# Altium PCB main_pcb.PcbDoc (part 1 of 2)
Units mil, origin at the board's own origin, x right, y up, seen from the top; angles counter-clockwise.
Board outline 4412.04 x 5197.88 mil, 4 copper layers (Top Layer, Mid-Layer Top, Mid-Layer Bottom, Bottom Layer); 125 components, 93 nets, 440 pads, 146 vias.
Unrouted connection lines stored in the file: 4.
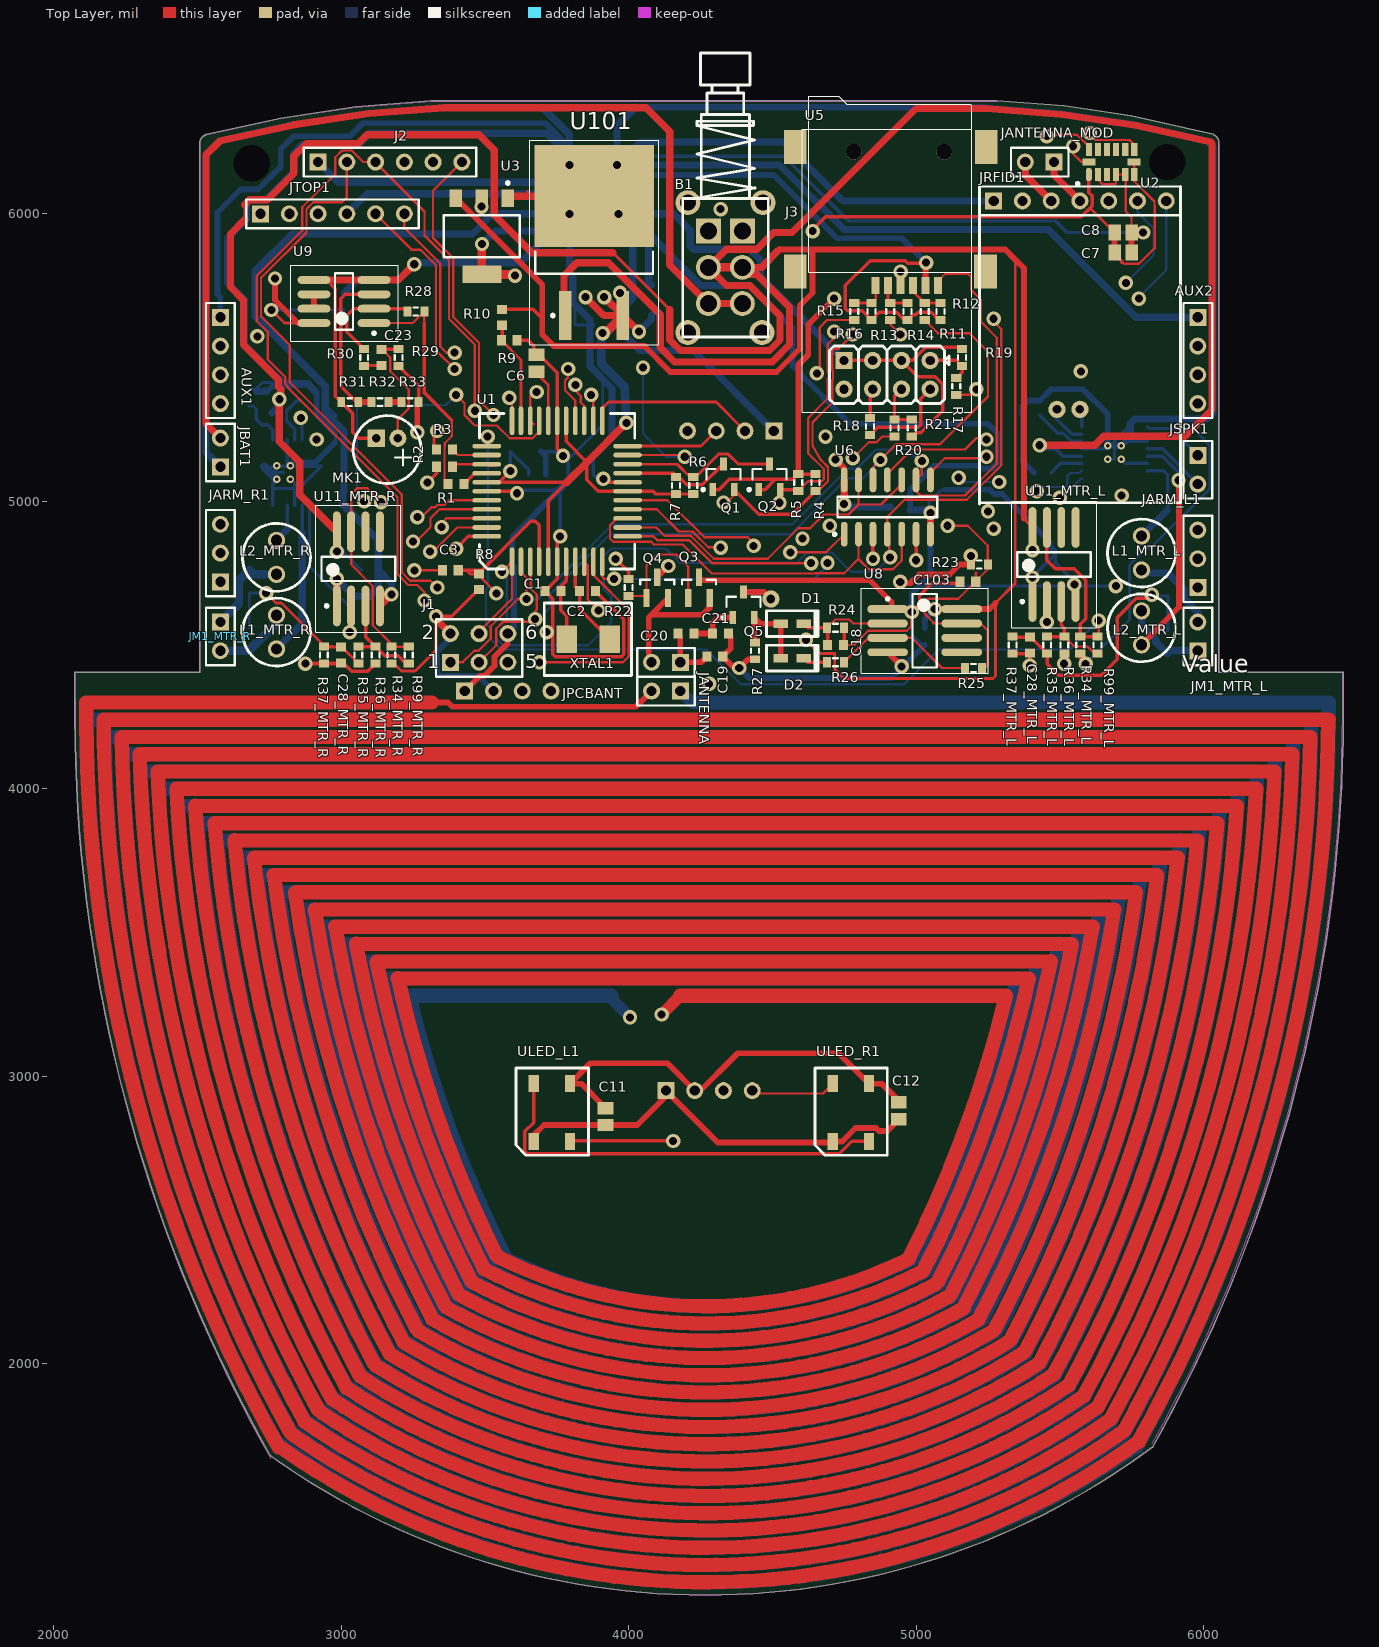
[diagram p0: Top Layer view]
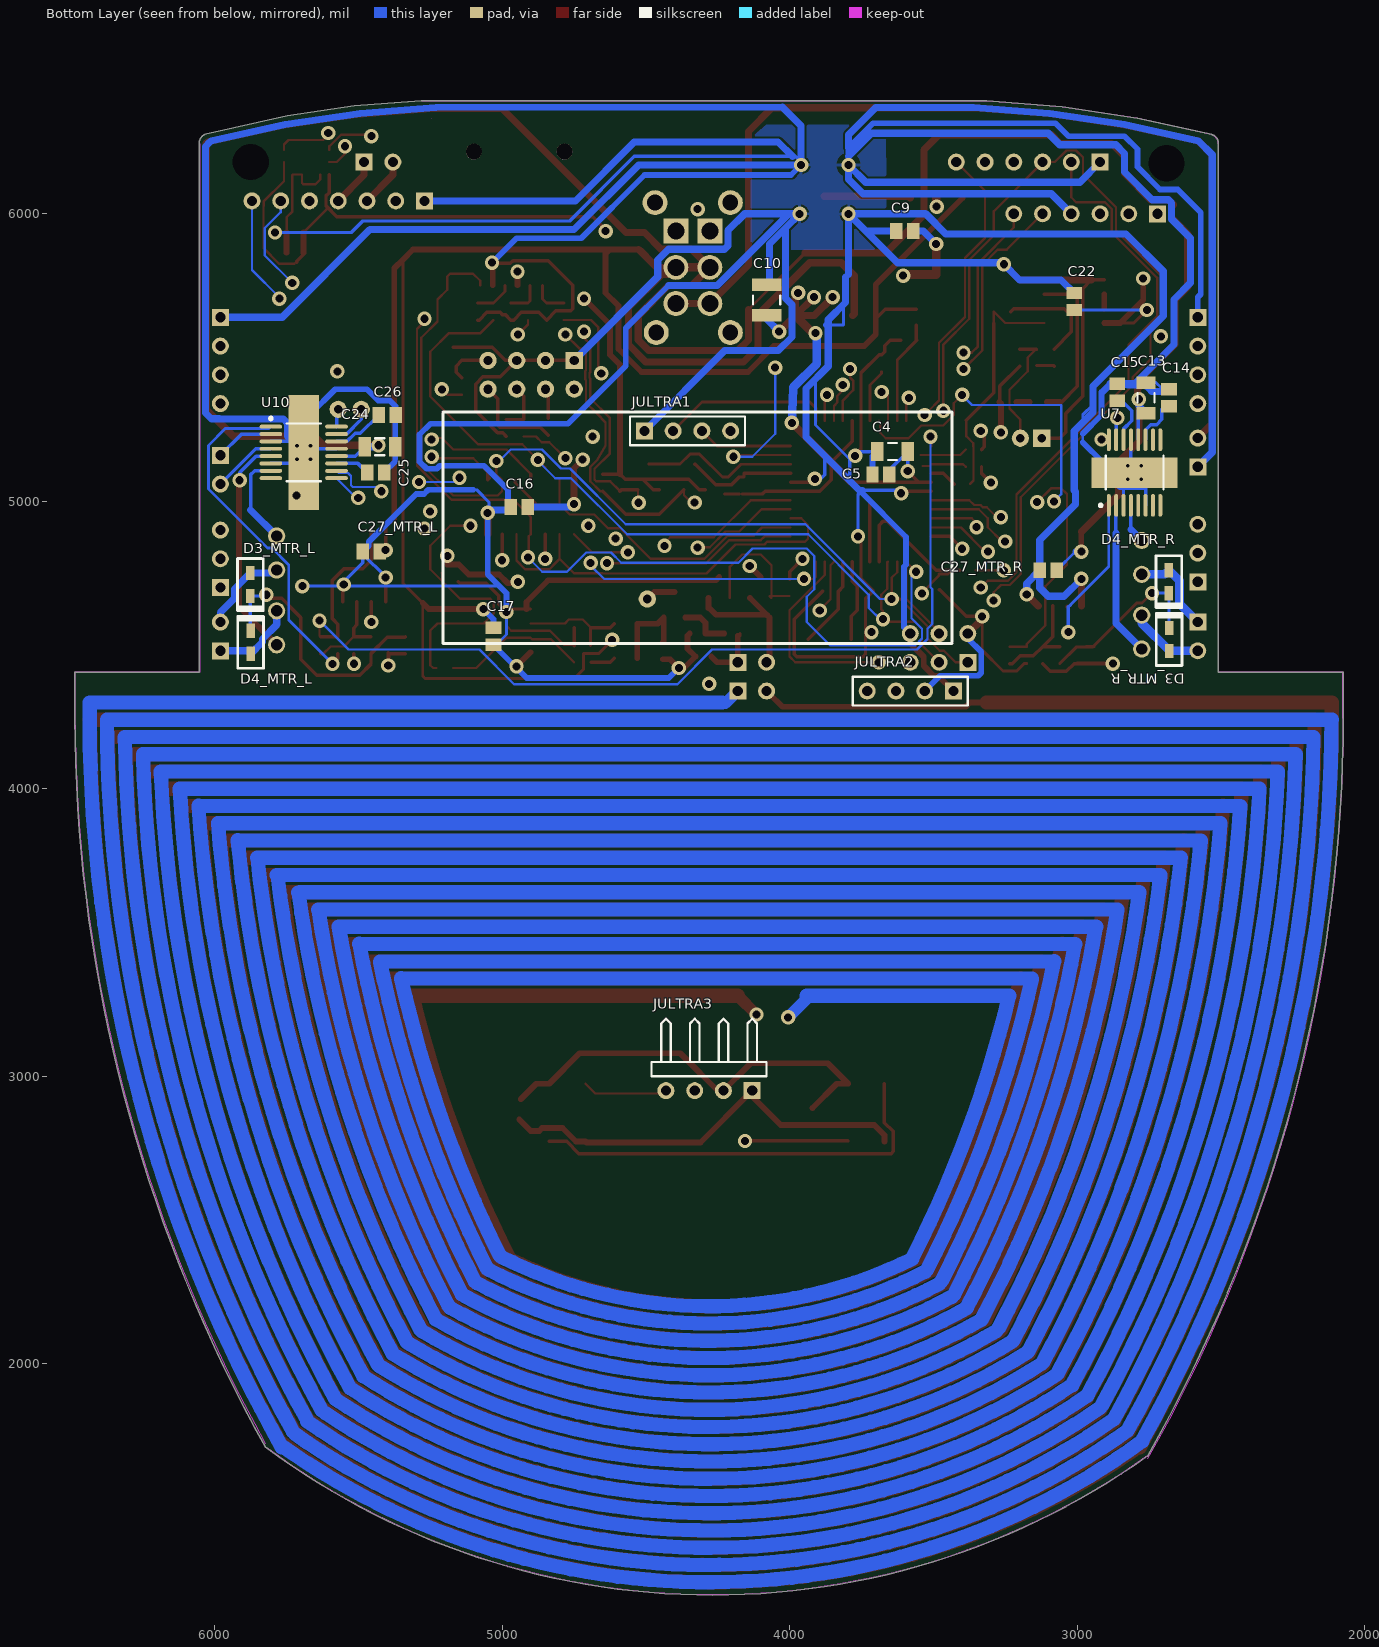
[diagram p1: Bottom Layer view, seen from below]
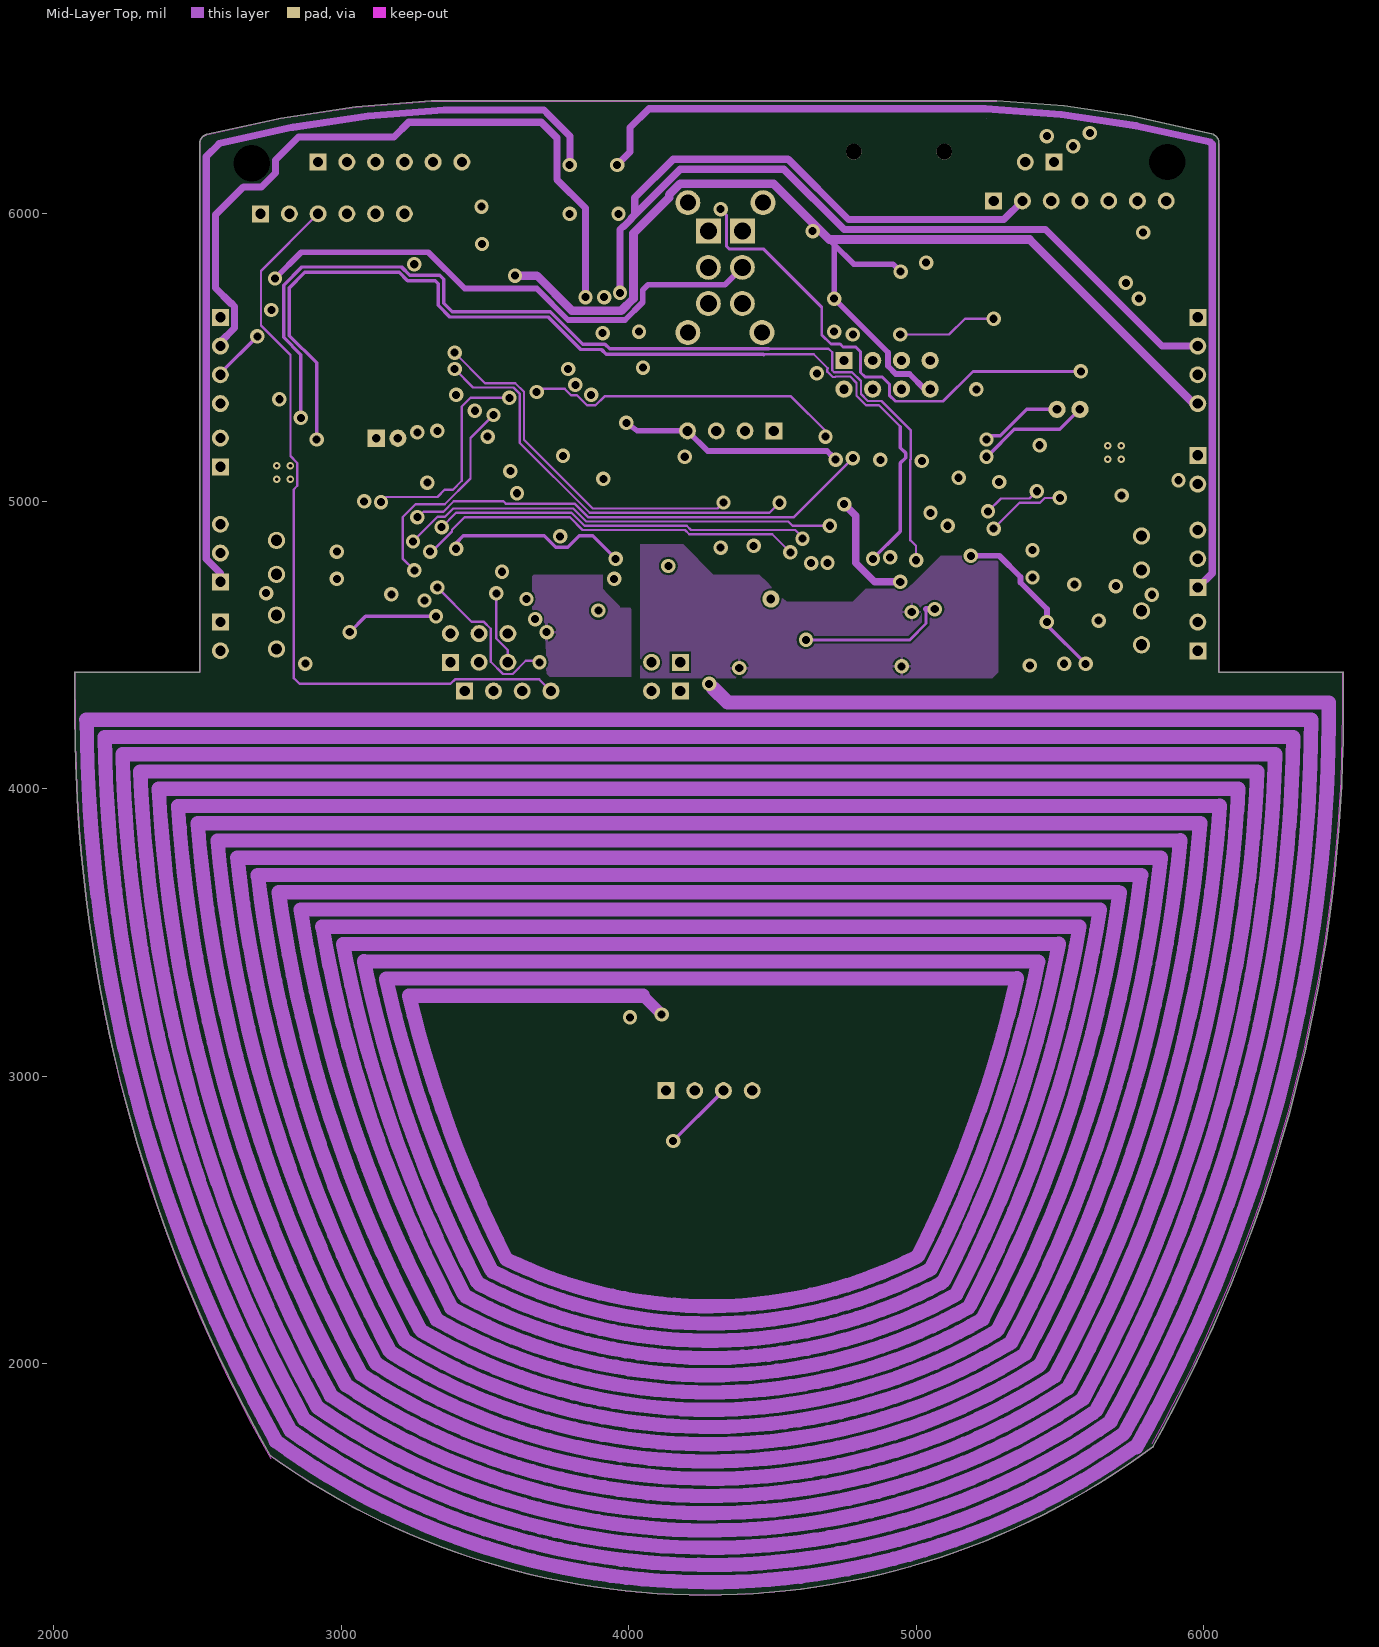
[diagram p2: Mid-Layer Top]
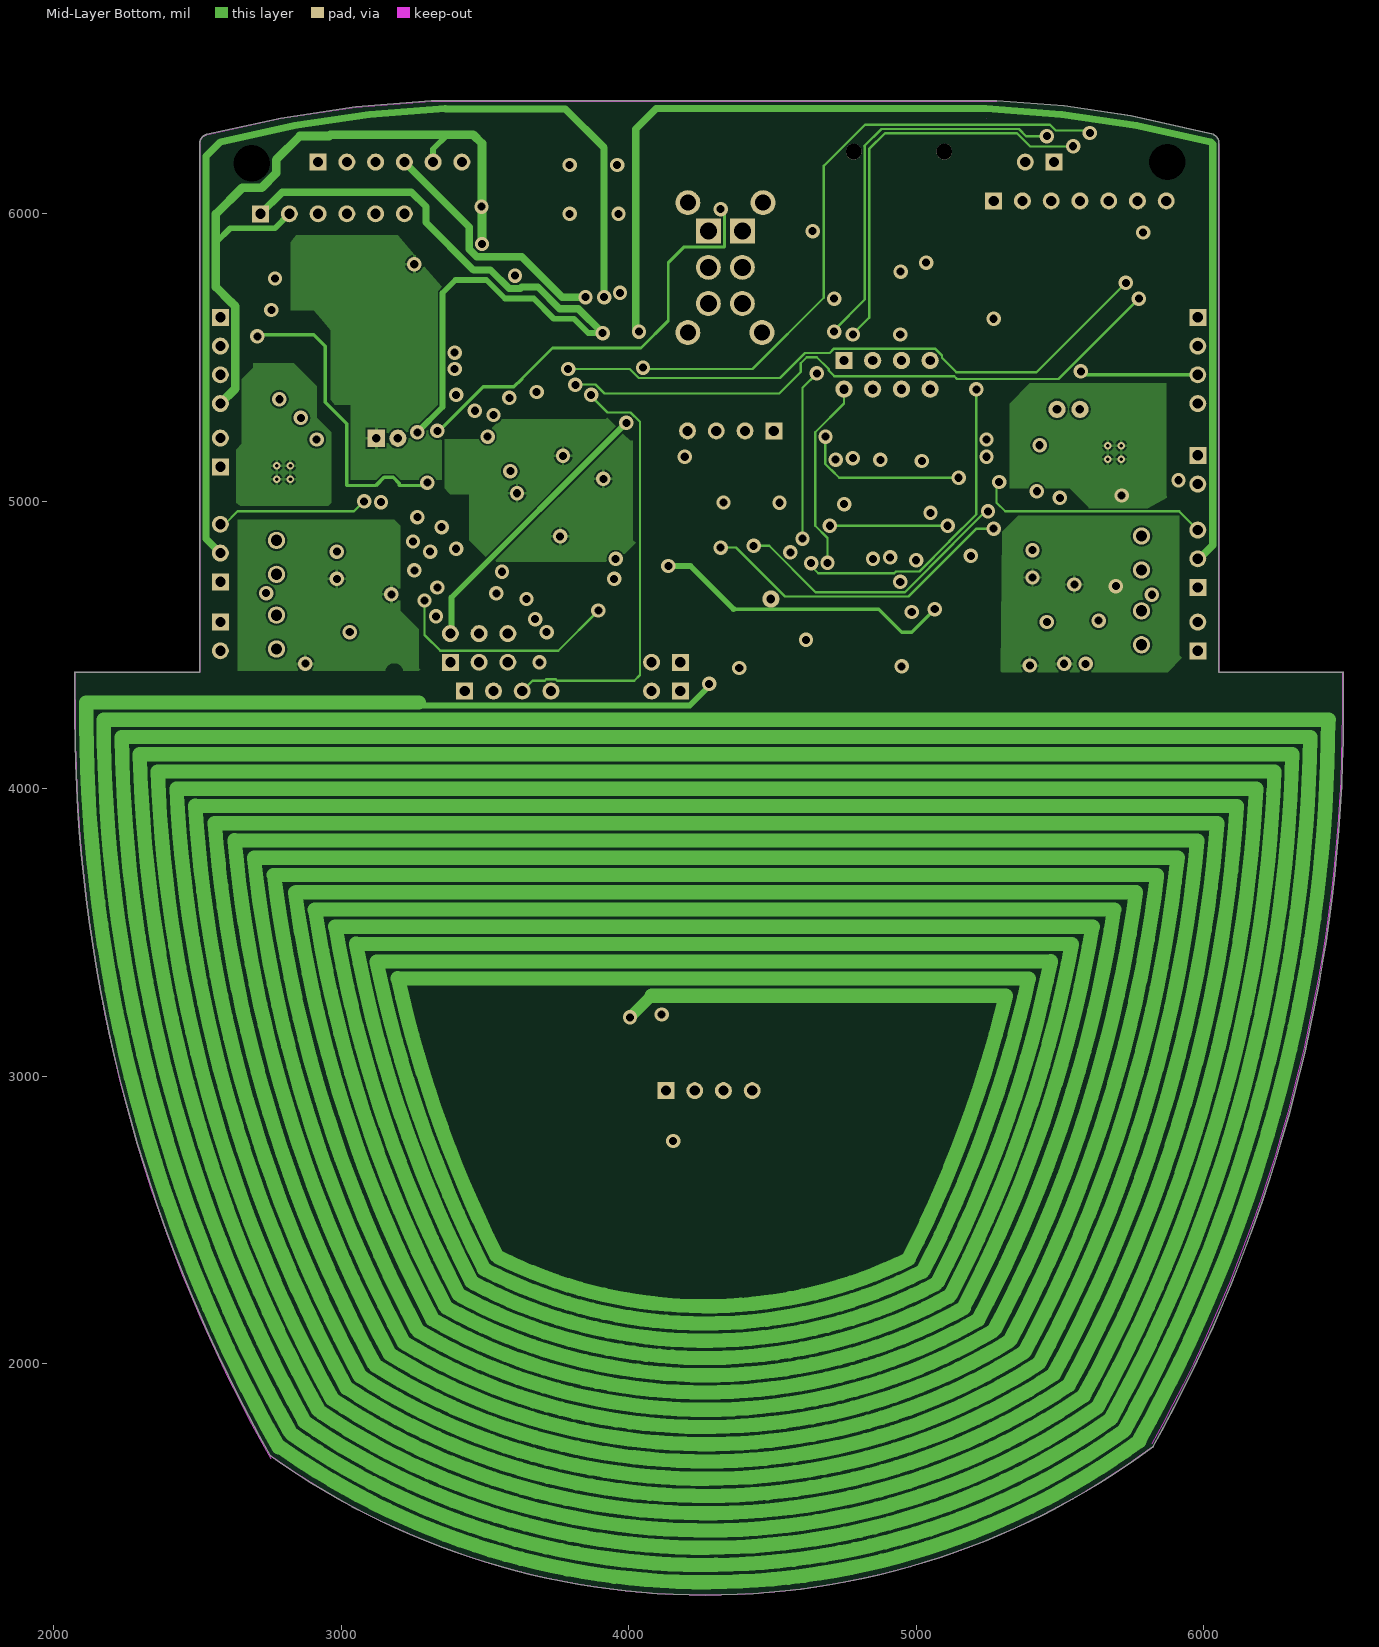
[diagram p3: Mid-Layer Bottom]

## Layer stack, top to bottom
Top Layer: signal copper 1.4
Dielectric: core 12.6, FR-4, Dk 4.8
Mid-Layer Top: signal copper 0.7
Dielectric: prepreg 12.6, FR-4, Dk 4.8
Mid-Layer Bottom: signal copper 0.7
Dielectric: core 12.6, FR-4, Dk 4.8
Bottom Layer: signal copper 1.4

## Board outline
2073.99,4249.98 cw(c7308.62,4260.06) 2073.99,4270.14 2073.99,4405 cw(c2075,4405) 2075,4406.02 2508.06,4406.02 2508.04,6244.45 cw(c2509.05,6244.45) 2508.04,6244.48 2508.11,6246.69 cw(c2509.13,6246.66) 2508.12,6246.76 2508.35,6248.96 cw(c2509.36,6248.85) 2508.36,6249.03 2508.74,6251.2 cw(c2509.74,6251.03) 2508.76,6251.26 cw(c2509.74,6251.03) 2508.76,6251.28 2509.29,6253.41 cw(c2510.28,6253.17) 2509.3,6253.42 2509.29,6253.42 cw(c2510.28,6253.17) 2509.31,6253.48 2510,6255.58 cw(c2510.96,6255.27) 2510.02,6255.65 2510.85,6257.7 cw(c2511.79,6257.32) 2510.88,6257.76 2511.84,6259.74 cw(c2512.76,6259.3) 2511.88,6259.81 2511.87,6259.8 cw(c2512.76,6259.3) 2511.88,6259.81 2512.97,6261.71 cw(c2513.86,6261.21) 2512.98,6261.73 cw(c2513.86,6261.21) 2513.02,6261.78 2513.01,6261.78 cw(c2513.86,6261.21) 2513.02,6261.79 2514.25,6263.61 cw(c2515.1,6263.04) 2514.26,6263.62 2514.25,6263.61 cw(c2515.1,6263.04) 2514.3,6263.67 2515.65,6265.41 cw(c2516.45,6264.78) 2515.7,6265.46 2517.18,6267.1 cw(c2517.93,6266.42) 2517.22,6267.15 cw(c2517.93,6266.42) 2517.23,6267.16 2518.81,6268.68 cw(c2519.52,6267.96) 2518.82,6268.7 cw(c2519.52,6267.96) 2518.87,6268.74 2520.56,6270.15 2520.56,6270.16 cw(c2521.21,6269.38) 2520.61,6270.2 cw(c2521.21,6269.38) 2520.62,6270.2 2522.39,6271.49 cw(c2523,6270.68) 2522.4,6271.5 cw(c2523,6270.68) 2522.46,6271.54 2524.33,6272.71 cw(c2524.87,6271.85) 2524.39,6272.74 2526.35,6273.78 cw(c2526.82,6272.88) 2526.41,6273.81 2526.42,6273.81 2528.42,6274.7 cw(c2528.84,6273.78) 2528.43,6274.71 cw(c2528.84,6273.78) 2528.52,6274.74 2531.81,6275.83 cw(c2532.65,6275.26) 2532.43,6276.25 2789.99,6333.21 cw(c2790.21,6332.22) 2790.06,6333.22 2790.07,6333.22 3050.97,6372.07 cw(c3051.13,6371.07) 3050.98,6372.08 cw(c3051.13,6371.07) 3051.05,6372.08 3314.4,6392.63 cw(c3315.24,6392.05) 3315.24,6393.06 5279.84,6393.06 cw(c5280.12,6392.09) 5280.2,6393.1 5514.78,6375.38 cw(c5514.71,6374.36) 5514.79,6375.37 cw(c5514.71,6374.36) 5514.85,6375.37 5514.86,6375.37 ccw(c5514.71,6374.36) 5514.85,6375.37 ccw(c5514.71,6374.36) 5514.78,6375.37 5514.86,6375.37 5747.62,6341.33 cw(c5747.48,6340.32) 5747.63,6341.33 5747.62,6341.33 cw(c5747.48,6340.32) 5747.7,6341.31 6034.58,6276.02 cw(c6034.35,6275.03) 6035.31,6275.36 6036.7,6274.64 cw(c6036.24,6273.74) 6036.71,6274.63 cw(c6036.24,6273.74) 6036.77,6274.6 6036.76,6274.61 ccw(c6036.24,6273.74) 6036.71,6274.64 6036.77,6274.6 6038.65,6273.46 6038.65,6273.45 cw(c6038.13,6272.59) 6038.71,6273.42 cw(c6038.13,6272.59) 6038.72,6273.41 6040.51,6272.14 cw(c6039.93,6271.31) 6040.52,6272.13 6040.51,6272.14 cw(c6039.93,6271.31) 6040.57,6272.09 6042.27,6270.69 cw(c6041.63,6269.91) 6042.33,6270.65 6042.32,6270.65 cw(c6041.63,6269.91) 6042.33,6270.64 6043.93,6269.14 cw(c6043.24,6268.39) 6043.94,6269.13 6043.93,6269.13 cw(c6043.24,6268.39) 6043.98,6269.08 6045.47,6267.46 cw(c6044.73,6266.77) 6045.52,6267.4 6046.9,6265.68 cw(c6046.11,6265.05) 6046.94,6265.62 6048.2,6263.81 cw(c6047.36,6263.23) 6048.23,6263.75 6048.24,6263.74 6049.36,6261.86 cw(c6048.49,6261.33) 6049.36,6261.85 cw(c6048.49,6261.33) 6049.39,6261.79 6050.38,6259.81 cw(c6049.48,6259.36) 6050.41,6259.75 6051.26,6257.71 cw(c6050.33,6257.32) 6051.29,6257.65 6051.99,6255.56 cw(c6051.03,6255.23) 6052.01,6255.49 6052.57,6253.36 cw(c6051.59,6253.1) 6052.59,6253.28 6052.99,6251.11 cw(c6052,6250.93) 6053,6251.04 6053.26,6248.86 cw(c6052.25,6248.74) 6053.27,6248.78 cw(c6052.25,6248.74) 6053.27,6248.74 6053.27,6248.78 6053.37,6246.22 cw(c6052.35,6246.18) 6053.37,6246.18 cw(c6052.35,6246.18) 6052.89,6245.31 cw(c6052.35,6244.45) 6053.37,6244.45 6053.37,4406.02 6485,4406.02 cw(c6485,4405) 6486.02,4405 6486.02,4245 cw(c6485,4245) 6486,4244.84 cw(c1251.38,4260.06) 5824.33,1712.58 cw(c5823.6,1711.88) 5824.62,1711.88 cw(c5823.6,1711.88) 5824.21,1711.06 cw(c4267.65,3801.61) 2755.04,1679.05 cw(c2755.11,1680.06) 2754.22,1679.56 cw(c7308.62,4260.06) 2074,4244.84 cw(c2075,4245) 2073.99,4245

## Design rules (kind name [scope] priority, off if disabled: settings)
Clearance [All] p1: gap=7
HoleSize [All] p1: absolutevalues=TRUE maxlimit=200 minlimit=1 maxpercent=80.000 minpercent=20.000
MinimumSolderMaskSliver [All] p1: minsoldermaskwidth=0
PolygonConnect [All] p1: connectstyle=Relief reliefconductorwidth=10 reliefentries=4 polygonreliefangle="90 Angle"
RoomDefinition main_pcb [InComponentClass('main_pcb')] p1: confinementstyle=ConfineIn formatcopy=TRUE lockcomponents=FALSE outline 1995,750 6550,750 6550,6595 1995,6595
RoomDefinition QRFID [InComponentClass('QRFID')] p2: confinementstyle=ConfineIn formatcopy=TRUE lockcomponents=FALSE outline 3295,4375 5285,4375 5285,4850 3295,4850
RoomDefinition QMIC [InComponentClass('QMIC')] p3: confinementstyle=ConfineIn formatcopy=TRUE lockcomponents=FALSE outline 2730,5040 3350,5040 3350,5870 2730,5870
RoomDefinition MTR_R [InComponentClass('MTR_R')] p4: confinementstyle=ConfineIn formatcopy=TRUE lockcomponents=FALSE outline 2504.06,4415 3295,4415 3295,5065 2504.06,5065
RoomDefinition MTR_L [InComponentClass('MTR_L')] p5: confinementstyle=ConfineIn formatcopy=TRUE lockcomponents=FALSE outline 6045,5060 5270,5060 5270,4410 6045,4410
RoutingVias [All] p1: holewidth=28 width=50 viastyle="Through Hole" minholewidth=28 minwidth=50 maxholewidth=98.43 maxwidth=62.99
SilkToSilkClearance [All] p1: silktosilkclearance=0
SilkscreenOverComponentPads [All] p1: minsilkscreentomaskgap=4
SolderMaskExpansion [All] p1: expansion=4
Width [All] p1: maxlimit=60 minlimit=7 preferedwidth=10 minimp=50.000000 maximp=50.000000 favimp=50.000000
24 further rules are at their usual default settings.

## Classes and differential pairs
component class main_pcb: AUX1 AUX2 B1 C1 C2 C3 C4 C5 C6 C7 C8 C9 C10 C11 C12 C13 C14 C15 C16 C24 C25 C26 J1 J2 J3 JANTENNA_MOD JARM_L1 JARM_R1 JBAT1 JRFID1 JSPK1 JTOP1 JULTRA1 Q1 Q2 R1 R2 R3 R4 R5 R6 R7 R8 R9 R10 R11 R12 R13 R14 R15 R16 R17 R18 R19 R20 R21 U1 U2 U3 U5 U6 U7 U10 U101 ULED_L1 ULED_R1 XTAL1
component class MTR_L: C27_MTR_L C28_MTR_L D3_MTR_L D4_MTR_L JM1_MTR_L L1_MTR_L L2_MTR_L R34_MTR_L R35_MTR_L R36_MTR_L R37_MTR_L R99_MTR_L U11_MTR_L
component class MTR_R: C27_MTR_R C28_MTR_R D3_MTR_R D4_MTR_R JM1_MTR_R L1_MTR_R L2_MTR_R R34_MTR_R R35_MTR_R R36_MTR_R R37_MTR_R R99_MTR_R U11_MTR_R
component class QMIC: C22 C23 MK1 R28 R29 R30 R31 R32 R33 U9
component class QRFID: C17 C18 C19 C20 C21 C103 D1 D2 JANTENNA Q3 Q4 Q5 R22 R23 R24 R25 R26 R27 U8
channel class motor: MTR_L MTR_R

## Components (designator, comment, footprint, x,y, rotation, side; value= is the part's Value field where it differs from the comment)
AUX1 "Header 4H" HDR1X4 2580,5640 r270 top
AUX2 "Header 4H" HDR1X4 5980,5640 r270 top
B1 "ON/OFF" KGPS22F03 4330,5810 r0 top
C1 "24pF" CAPC1608L 3737.05,4687.95 r0 top
C2 "24pF" CAPC1608L 3857.05,4687.95 r180 top
C3 "0.1uF" CAPC1608L 3380,4760 r0 top
C4 "10uF" CAPC3216L 3642.05,5172.95 r180 bottom
C5 "0.1uF" CAPC2012L 3682.05,5092.95 r180 bottom
C6 "0.1uF" CAPC2012L 3680,5480 r270 top
C7 "Tantalum 1uF" CAPC2012L 5720,5865 r0 top
C8 "0.1uF" CAPC2012L 5720,5935 r0 top
C9 "10uF" CAPC2012L 3600,5940 r0 bottom
C10 "100uF" CAPC3225L 4080,5700 r90 bottom
C11 "0.1uF" CAPC2012L 3920,2860 r270 top
C12 "0.1uF" CAPC2012L 4940,2880 r270 top
C13 "10uF" CAPC3216L 2760,5360 r270 bottom
C14 "10nF/16V" CAPC2012L 2680,5360 r270 bottom
C15 "2.2uF" CAPC2012L 2860,5380 r270 bottom
C16 "0.1uF" CAPC2012L 4940,4980 r0 bottom
C17 "0.1uF" CAPC2012L 5030,4530 r270 bottom
C18 "0.1uF" CAPC1608L 4720,4500 r180 top
C19 "3320pF" CAPC1608L 4300,4460 r180 top
C20 "10pF" CAPC1608L 4200,4540 r180 top
C21 "100pF" CAPC1608L 4320,4540 r180 top
C22 "0.1uF" CAPC2012L 3010,5695 r90 bottom
C23 "0.1uF" CAPC1608L 3140,5500 r90 top
C24 "10uF" CAPC3216L 5425,5190 r0 bottom
C25 "10nF/16V" CAPC2012L 5440,5100 r0 bottom
C26 "2.2uF" CAPC2012L 5400,5300 r0 bottom
C27_MTR_L "0.1uF" CAPC2012L 5455,4825 r0 bottom (schematic designator C27)
C27_MTR_R "0.1uF" CAPC2012L 3100,4760 r0 bottom (schematic designator C27)
C28_MTR_L "10nF" CAPC1608L 5395.94,4500 r270 top (schematic designator C28)
C28_MTR_R "10nF" CAPC1608L 3000,4465 r270 top (schematic designator C28)
C103 "10nF" CAPC1608L 5180,4720 r0 top
D1 "B5817WS-TP" SOD_323 4570,4575 r0 top
D2 "B5817WS-TP" SOD_323 4570,4455 r0 top
D3_MTR_L "B5817WS-TP" SOD_323 5875,4710 r270 bottom (schematic designator D3)
D3_MTR_R "B5817WS-TP" SOD_323 2680,4520 r90 bottom (schematic designator D3)
D4_MTR_L "B5817WS-TP" SOD_323 5875,4510 r90 bottom (schematic designator D4)
D4_MTR_R "B5817WS-TP" SOD_323 2680,4720 r270 bottom (schematic designator D4)
J1 "ISP" HDR2X3 3380,4440 r0 top
J2 "USB CP2102" HDR1X6 2920,6180 r0 top
J3 "micro SD" MICRO_SD 4920,6080 r0 top locked
JANTENNA "ANTENNA" HDR1X2 4180,4440 r180 top
JANTENNA_MOD "ANTENNA_MOD" HDR1X2 5480,6180 r180 top
JARM_L1 "Header 3H" HDR1X3 5980,4700 r90 top
JARM_R1 "Header 3H" HDR1X3 2580,4720 r90 top
JBAT1 "Header 2" HDR1X2 2580,5120 r90 top
JM1_MTR_L "Value" HDR1X2 5980,4480 r90 top (schematic designator JM1)
JM1_MTR_R "Value" HDR1X2 2580,4580 r270 top (schematic designator JM1)
JPCBANT "ANTENNA" HDR1X2 4180,4340 r180 top (schematic designator JANTENNA)
JRFID1 "RFID" HDR1X7 5270,6045 r0 top
JSPK1 "HDR1X2H" HDR1X2 5980,5160 r270 top
JTOP1 "Value" HDR1X6 2720,6000 r0 top
JULTRA1 "Header 4" HDR1X4 4505,5245 r180 bottom
JULTRA2 "Header 4" HDR1X4 3430,4340 r0 bottom (schematic designator JULTRA1)
JULTRA3 "Header 4" HDR1X4H 4130,2950 r0 bottom (schematic designator JULTRA1)
L1_MTR_L "1.5mH" InductorThruHole 5784.06,4820 r270 top (schematic designator L1)
L1_MTR_R "1.5mH" InductorThruHole 2775,4545 r90 top (schematic designator L1)
L2_MTR_L "1.5mH" InductorThruHole 5784.06,4560 r270 top (schematic designator L2)
L2_MTR_R "1.5mH" InductorThruHole 2775,4805 r90 top (schematic designator L2)
MK1 "Mic2" electret_6mm 3160,5180 r0 top
Q1 "IRLML2402" SOT-23_N 4330,5085 r90 top
Q2 "IRLML2402" SOT-23_N 4490,5085 r90 top
Q3 "SS8550" SOT23_BJT 4245,4700 r90 top
Q4 "SS8050" SOT23_BJT 4100,4700 r90 top
Q5 "IRLML2402" SOT-23_N 4400,4640 r90 top
R1 "10k" CAPC1608L 3400,5060 r180 top
R2 "10k" CAPC1608L 3360,5120 r180 top
R3 "10k" CAPC1608L 3360,5180 r180 top
R4 "10k" RESC1608L 4650,5065 r270 top
R5 "10k" RESC1608L 4590,5065 r270 top
R6 "10k" RESC1608L 4225,5055 r90 top
R7 "10k" RESC1608L 4165,5055 r90 top
R8 "10k" CAPC1608L 3480,4720 r90 top
R9 "10k" CAPC1608L 3585,5560 r180 top
R10 "10k" CAPC1608L 3560,5640 r90 top
R11 "4.7k" RESC1608L 5030,5660 r270 top
R12 "10k" RESC1608L 5085,5660 r270 top
R13 "4.7k" RESC1608L 4910,5660 r270 top
R14 "10k" RESC1608L 4970,5660 r270 top
R15 "4.7k" RESC1608L 4785,5660 r270 top
R16 "10k" RESC1608L 4845,5660 r270 top
R17 "4.7k" RESC1608L 5140,5400 r270 top
R18 "10k" RESC1608L 4840,5260 r90 top
R19 "10k" RESC1608L 5160,5500 r90 top
R20 "4.7k" RESC1608L 4925,5255 r270 top
R21 "10k" RESC1608L 4985,5255 r270 top
R22 "2.2k" RESC1608L 4000,4700 r90 top
R23 "10k" RESC1608L 5220,4780 r0 top
R24 "10M" RESC1608L 4720,4560 r0 top
R25 "1M" RESC1608L 5200,4420 r0 top
R26 "330k" RESC1608L 4720,4440 r180 top
R27 "2.2k" RESC1608L 4440,4480 r270 top
R28 "100k" RESC1608L 3260,5660 r0 top
R29 "3.3k" RESC1608L 3200,5500 r90 top
R30 "22" RESC1608L 3080,5500 r90 top
R31 "10k" RESC1608L 3030,5345 r0 top
R32 "10k" RESC1608L 3135,5345 r0 top
R33 "10k" RESC1608L 3240,5345 r0 top
R34_MTR_L "10k" RESC1608L 5570.94,4500 r90 top (schematic designator R34)
R34_MTR_R "10k" RESC1608L 3175,4465 r90 top (schematic designator R34)
R35_MTR_L "470k" RESC1608L 5455.94,4500 r90 top (schematic designator R35)
R35_MTR_R "470k" RESC1608L 3060,4465 r90 top (schematic designator R35)
R36_MTR_L "470k" RESC1608L 5515.94,4500 r90 top (schematic designator R36)
R36_MTR_R "470k" RESC1608L 3120,4465 r90 top (schematic designator R36)
R37_MTR_L "100k" RESC1608L 5335.94,4500 r270 top (schematic designator R37)
R37_MTR_R "100k" RESC1608L 2940,4465 r270 top (schematic designator R37)
R99_MTR_L "1M" RESC1608L 5630.94,4500 r90 top (schematic designator R99)
R99_MTR_R "1M" RESC1608L 3235,4465 r90 top (schematic designator R99)
U1 "MCU" atmega644p 3762.05,5072.95 r180 top
U2 "ADXL345" ADXL345 5680,6180 r90 top
U3 "LM1117_3.3" LM1117 3500,5935 r90 top
U5 "ESP8266" ESP8266 4840,5440 r90 top locked
U6 "SN74HC08D" D014_N 4900,4980 r90 top
U7 "DRV8833" DRV8833#1 2800,5100 r90 bottom
U8 "LM311DR" LM311DR 5030,4550 r0 top
U9 "LM358D" LM358D 3010,5695 r180 top
U10 "DRV8833" DRV8833#2 5690,5170 r180 bottom
U11_MTR_L "LM311DR" LM311DR 5480,4780 r90 top (schematic designator U11)
U11_MTR_R "LM311DR" LM311DR 3060,4765 r90 top (schematic designator U11)
U101 "L7805CD2T" L7805CD2T 3880,5900 r90 top
ULED_L1 "WS2812B" WS2812B 3730,2875 r270 top
ULED_R1 "WS2812B" WS2812B 4770,2875 r270 top
XTAL1 "445W33F16M00000" 445W33F16M00000 3860,4520 r180 top

## Footprints (in the part's own frame and the unit in brackets; to place one, negate y for a bottom-side part, rotate by r counter-clockwise, add the part's x,y. Pads: shape width x height; smd on the part's side, far side on the other; paste and mask are expansions set on the pad)
445W33F16M00000 [mm]
  rect 1.8x2.4 smd: 1(-1.9,0) 2(1.9,0)
  silkscreen extent -3.8,-3.2 3.9,3.2
ADXL345 [mm] "BGA, 14-Leads, Body 5.0x3.0mm,  Pitch 0.80mm"
  oct 1.145x0.55 smd: 1(-1.1,2)
  rect 1.145x0.55 smd: 2(-1.1,1.2) 3(-1.1,0.4) 4(-1.1,-0.4) 5(-1.1,-1.2) 6(-1.1,-2) 8(1.1,-2) 9(1.1,-1.2) 10(1.1,-0.4) 11(1.1,0.4) 12(1.1,1.2) 13(1.1,2)
  rect 0.6x1.145 smd: 7(0,-2) 14(0,2)
  silkscreen extent -2.05,2.87 -1.8,3.12, body extent -1.5,-2.5 1.5,2.5, height 1
atmega644p [mil]
  oval 16x100 smd: 1(167.45,282.95) 2(136.45,282.95) 3(104.45,282.95) 4(73.45,282.95) 5(41.45,282.95) 6(10.45,282.95) 7(-20.55,282.95) 8(-52.55,282.95) 9(-83.55,282.95) 10(-115.55,282.95) 11(-146.55,282.95) 23(-146.55,-207.05) 24(-115.55,-207.05) 25(-83.55,-207.05) 26(-52.55,-207.05) 27(-20.55,-207.05) 28(10.45,-207.05) 29(41.45,-207.05) 30(73.45,-207.05) 31(104.45,-207.05) 32(136.45,-207.05) 33(167.45,-207.05)
  oval 100x16 smd: 12(-234.55,194.95) 13(-234.55,163.95) 14(-234.55,131.95) 15(-234.55,100.95) 16(-234.55,68.95) 17(-234.55,37.95) 18(-234.55,6.95) 19(-234.55,-25.05) 20(-234.55,-56.05) 21(-234.55,-88.05) 22(-234.55,-119.05) 34(255.45,-119.05) 35(255.45,-88.05) 36(255.45,-56.05) 37(255.45,-25.05) 38(255.45,6.95) 39(255.45,37.95) 40(255.45,68.95) 41(255.45,100.95) 42(255.45,131.95) 43(255.45,163.95) 44(255.45,194.95)
  silkscreen extent -260,-232 280,308, body extent -183,-162 227,244, height 39
CAPC1608L [mm] "Chip Capacitor, Body 1.6x0.8mm, IPC High Density"
  rect 0.8x0.9 smd: 1(-0.7,0) 2(0.7,0)
  body extent -0.87,-0.48 0.87,0.48, height 1.3
CAPC2012L [mm] "Chip Capacitor, Body 2.0x1.3mm, IPC High Density"
  rect 1.1x1.4 smd: 1(-0.75,0) 2(0.75,0)
  body extent -1.1,-0.72 1.1,0.72, height 1.4
CAPC3216L [mm] "Chip Capacitor, Body 3.2x1.6mm, IPC High Density"
  rect 1.1x1.7 smd: 1(-1.35,0) 2(1.35,0)
  silkscreen extent -0.4,-0.75 0.4,0.75, body extent -1.7,-0.9 1.7,0.9, height 1.3
CAPC3225L [mm] "Chip Capacitor, Body 3.2x2.5mm, IPC High Density"
  rect 1.1x2.6 smd: 1(-1.35,0) 2(1.35,0)
  silkscreen extent -0.4,-1.2 0.4,1.2, body extent -1.7,-1.35 1.7,1.35, height 1.5
D014_N [mm] "SOIC, 14-Leads, Body 8.7x3.9mm, Pitch 1.27mm, IPC Medium Density"
  oval 2.2x0.6 smd: 1(-2.4,3.81) 2(-2.4,2.54) 3(-2.4,1.27) 4(-2.4,0) 5(-2.4,-1.27) 6(-2.4,-2.54) 7(-2.4,-3.81) 8(2.4,-3.81) 9(2.4,-2.54) 10(2.4,-1.27) 11(2.4,0) 12(2.4,1.27) 13(2.4,2.54) 14(2.4,3.81)
  silkscreen extent -2.52,-4.4 0.9,4.78, body extent -1.95,-4.33 1.95,4.33, height 1.75
DRV8833#1 [mm]
  oval 2x0.35 smd: 1(-2.9,2.275) 2(-2.9,1.625) 3(-2.9,0.975) 4(-2.9,0.325) 5(-2.9,-0.325) 6(-2.9,-0.975) 7(-2.9,-1.625) 8(-2.9,-2.275) 9(2.9,-2.275) 10(2.9,-1.625) 11(2.9,-0.975) 12(2.9,-0.325) 13(2.9,0.325) 14(2.9,0.975) 15(2.9,1.625) 16(2.9,2.275)
  rect 2.7x7.62 smd: PP(0,0)
  silkscreen extent -3.02,-2.55 1.5,3.13, body extent -2.25,-2.55 2.25,2.55, height 1.2
DRV8833#2 [mm]
  oval 2x0.35 smd: 1(-2.9,2.275) 2(-2.9,1.625) 3(-2.9,0.975) 4(-2.9,0.325) 5(-2.9,-0.325) 6(-2.9,-0.975) 7(-2.9,-1.625) 8(-2.9,-2.275) 9(2.9,-2.275) 10(2.9,-1.625) 11(2.9,-0.975) 12(2.9,-0.325) 13(2.9,0.325) 14(2.9,0.975) 15(2.9,1.625) 16(2.9,2.275)
  rect 2.7x10.16 smd: PP(0,0)
  silkscreen extent -3.03,-2.55 1.5,3.12, body extent -2.25,-2.55 2.25,2.55, height 1.2
electret_6mm [mil]
  round 60 hole 30: 1(37.4,39.37)
  rect 60x60 hole 30: 2(-37.4,39.37)
  silkscreen extent -118,-118 118,118
ESP8266 [mil]
  round 60 hole 32: CH_PD(-49.94,-9.12) GPIO0(50.06,-109.12) GPIO2(50.06,-9.12) RST(-49.94,-109.12) RXD(50.06,-209.12) TXD(-49.94,90.88) VCC(-49.94,-209.12)
  rect 60x60 hole 32: GND(50.06,90.88)
  silkscreen extent -130,-354 854,236, body extent -94,-248 91,130, height 315
HDR1X2 [mm] "Connector; Header; 2 Position"
  rect 1.5x1.5 hole 0.9: 1(0,0)
  round 1.5 hole 0.9: 2(2.54,0)
  silkscreen extent -1.27,-1.27 3.81,1.27
HDR1X3 [mm] "Connector; Header; 3 Position"
  rect 1.5x1.5 hole 0.9: 1(0,0)
  round 1.5 hole 0.9: 2(2.54,0) 3(5.08,0)
  silkscreen extent -1.27,-1.27 6.35,1.27
HDR1X4 [mm] "Connector; Header; 4 Position"
  rect 1.5x1.5 hole 0.9: 1(0,0)
  round 1.5 hole 0.9: 2(2.54,0) 3(5.08,0) 4(7.62,0)
  silkscreen extent -1.27,-1.27 8.89,1.27
HDR1X4H [mm] "Connector; Header; 4 Position; Right Angle"
  rect 1.5x1.5 hole 0.9: 1(0,0)
  round 1.5 hole 0.9: 2(2.54,0) 3(5.08,0) 4(7.62,0)
  silkscreen extent -1.27,-6.35 8.89,-1.27
HDR1X6 [mm] "Connector; Header; 6 Position"
  rect 1.5x1.5 hole 0.9: 1(0,0)
  round 1.5 hole 0.9: 2(2.54,0) 3(5.08,0) 4(7.62,0) 5(10.16,0) 6(12.7,0)
  silkscreen extent -1.27,-1.27 13.97,1.27
HDR1X7 [mm] "Connector; Header; 7 Position"
  rect 1.5x1.5 hole 0.9: 1(0,0)
  round 1.5 hole 0.9: 2(2.54,0) 3(5.08,0) 4(7.62,0) 5(10.16,0) 6(12.7,0) 7(15.24,0)
  silkscreen extent -1.27,-1.27 16.51,1.27
HDR2X3 [mm] "Connector; Header; 3x2 Position"
  rect 1.5x1.5 hole 0.9: 1(0,0)
  round 1.5 hole 0.9: 2(0,2.54) 3(2.54,0) 4(2.54,2.54) 5(5.08,0) 6(5.08,2.54)
  silkscreen extent -1.27,-1.27 6.35,3.81
InductorThruHole [mil]
  round 60 hole 39.37: 1(-59.06,0) 2(59.06,0)
  silkscreen extent -118,-118 118,118
KGPS22F03 [mm]
  round 2.2 hole 1.4: 0(-3.146,-5.666) 0(-3.146,5.814) 0(3.399,-5.666) 0(3.5,5.814)
  rect 2.2x2.2 hole 1.5: 1(-1.334,3.296) 6(1.666,3.296)
  round 2.2 hole 1.5: 2(-1.334,0.096) 3(-1.334,-3.104) 4(1.666,-3.104) 5(1.666,0.096)
  silkscreen extent -3.59,-6.05 3.96,19.04, body extent -3.15,-5.7 3.5,19, height 9
L7805CD2T [mm] "D2-PAK, 3-Pads, Body 9.4x10.4mm (max), IPC Low Density"
  rect 4.3x1.1 smd: 5V(-6.45,-2.54) IN(-6.45,2.54)
  rect 9x10.55 smd: GND(4.1,0)
  silkscreen extent -9.05,-5.7 9.05,5.7, body extent -2.75,-5.2 6.6,5.2, height 4.6
LM311DR [mm] "SOIC, 8-Leads, Body 6.5x5.6mm (max), Pitch 1.27mm, IPC Low Density"
  oval 3.6x0.7 smd: 1(-3.275,1.905) 2(-3.275,0.635) 3(-3.275,-0.635) 4(-3.275,-1.905) 5(3.275,-1.905) 6(3.275,-0.635) 7(3.275,0.635) 8(3.275,1.905)
  silkscreen extent -5.6,-3.75 5.6,3.75, body extent -2.8,-3.25 2.8,3.25, height 2
LM358D [mm] "SOIC, 8-Leads, Body 5.0x4.0mm (max), Pitch 1.27mm, IPC Low Density"
  oval 2.9x0.7 smd: 1(-2.65,1.905) 2(-2.65,0.635) 3(-2.65,-0.635) 4(-2.65,-1.905) 5(2.65,-1.905) 6(2.65,-0.635) 7(2.65,0.635) 8(2.65,1.905)
  silkscreen extent -4.8,-3.2 4.7,3.5, body extent -2,-2.5 2,2.5, height 1.75
LM1117 [mm]
  rect 1.55x1.1 smd: 1(3.045,-2.031) 2(3.045,0.269) 3(3.045,2.569)
  rect 1.55x3.45 smd: 2(-3.705,0.269)
  silkscreen extent -2.18,-3.08 4.49,3.62, body extent -2.11,-3.01 1.49,3.59, height 4
MICRO_SD [mm]
  rect 2x3 smd: 0(-8.658,-7.124) 0(-8.658,3.876) 0(8.166,-7.124) 0(8.241,3.876)
  round 1.4 hole 1.4: 0(4.523,3.463) 1(-3.477,3.463)
  rect 0.7x1.5 smd: 2(-1.534,-8.349) 3(-0.434,-8.349) 4(0.666,-8.349) 5(1.766,-8.349) 6(2.866,-8.349) 7(3.966,-8.349)
  silkscreen extent -7.45,-7.2 6.97,8.35, body extent -7.45,-7.24 6.95,12.26, height 4
RESC1608L [mm] "Chip Resistor, Body 1.6x0.8mm, IPC High Density"
  rect 0.7x0.9 smd: 1(-0.75,0) 2(0.75,0)
  silkscreen extent -0.2,-0.35 0.2,0.35, body extent -0.85,-0.48 0.85,0.48, height 0.9
SOD_323 [mil]
  rect 50x30 smd: 1(-40.55,-0.63) 2(39.45,-0.63)
  silkscreen extent -91,-46 89,44
SOT23_BJT [mm] "SOT23, 3-Leads, Body 3.0x2.6mm (max), Pitch 0.95mm, IPC Medium Density"
  rect 1.55x0.55 smd: B(-0.925,0.95) C(0.925,0) E(-0.925,-0.95)
  silkscreen extent 0.3,-1.5 0.7,1.5, body extent -0.7,-1.5 0.7,1.5, height 1.1
SOT-23_N [mm] "SOT23, 3-Leads, Body 2.9x1.3mm, Pitch 0.95mm, Lead Span 2.3mm, IPC Medium Density"
  rect 1.15x0.6 smd: 1(-1.125,0.95) 2(-1.125,-0.95) 3(1.125,0)
  silkscreen extent -1.25,-1.5 0.7,1.92, body extent -0.7,-1.5 0.7,1.5, height 1.11
WS2812B [mm]
  rect 1.5x0.9 smd: 1(-2.519,1.678) 2(-2.519,-1.522) 3(2.581,-1.522) 4(2.581,1.678)
  silkscreen extent -3.9,-3.1 3.8,3.3, body extent -2.52,-2.42 2.48,2.58, height 0.6

## Part data
AUX1 AUX2: "Header, 4-Pin, Right Angle"
B1: library part Component_1
C1 C2 C3 C4 C11 C12 C13 C14 C15 C17 C18 C19 C20 C21 C22 C23 C24 C25 C26 C27_MTR_L C27_MTR_R C28_MTR_L C28_MTR_R C103: library part Cap, "Capacitor"
C5 C6: library part CAP0402
C7 C8 C9 C10 C16: library part "Cap Pol2", "Polarized Capacitor (Axial)"
J1: library part "Header 3X2", "Header, 3-Pin, Dual row"
J2 JTOP1: library part "Header 6", "Header, 6-Pin"
J3: library part "JJ TRANSFLASH", "Transflash Socket"
JANTENNA JANTENNA_MOD JM1_MTR_L JM1_MTR_R JPCBANT JSPK1: library part "Header 2", "Header, 2-Pin"
JARM_L1 JARM_R1: "Header, 3-Pin, Right Angle"
JBAT1: "Header, 2-Pin"
JRFID1: library part "Header 7", "Header, 7-Pin"
JULTRA1 JULTRA2 JULTRA3: "Header, 4-Pin"
L1_MTR_L L1_MTR_R L2_MTR_L L2_MTR_R: library part "Inductor Iron", "Magnetic-Core Inductor"
MK1: "Microphone"
Q1 Q2 Q5: "HEXFET Power MOSFET"
R1 R2 R3 R4 R5 R6 R7 R8 R9 R10 R11 R12 R13 R14 R15 R16 R17 R18 R19 R20 R21 R22 R23 R24 R25 R26 R27 R28 R29 R30 R31 R32 R33 R34_MTR_L R34_MTR_R R35_MTR_L R35_MTR_R R36_MTR_L R36_MTR_R R37_MTR_L R37_MTR_R R99_MTR_L R99_MTR_R: library part Res2, "Resistor"
U1: library part ATmega644-20AU, "8-bit AVR Microcontroller, 2.7-5.5V, 20MHz, 64KB Flash, 2KB EEPROM, 4KB SRAM, 44-pin TQFP"
U3: library part LM1117
U6: "Quadruple 2-Input Positive-AND Gate"
U9: "Dual Operational Amplifier"

## Free pads (board coordinates)
  round 60 hole 30: 0(4495,4660) 0(5490,5320) 0(5570,5320)
  round 60 hole 125.98: 2(2689,6176) 2(5873.98,6180)

## Via types
v1: diameter 50, hole 28, Top Layer to Bottom Layer, 138 vias
v2: diameter 25.98, hole 12.99, Top Layer to Bottom Layer, tented top, 8 vias

## Nets (pads, with @x,y where several pads share a name; then routed paths per layer and width w, separated by ;. In a path a pad name is that pad's centre, name@x,y a point inside that pad or via, vN(x,y) a via of type N, cw(c..) or ccw(c..) an arc to the next point about the centre after c; other vN are vias at no path point)
ACCEL_INT: U1.21 U2.8 | length 3024.5
  Top Layer w8: U1.21@3996.6,5161 4194,5161 4197.66,5157.34 4200,5155 v1(4195.32,5155) ; v1(5604.7,6281.21) 5600.91,6285 5595,6285 5601.75,6278.25 5623.15,6256.85 5742.63,6256.85 5758.74,6240.73 U2.8@5758.74,6223.31
  Mid-Layer Bottom w8: v1(4050,5465) 4055,5460 4431.29,5460 4679,5707.71 4679,6166.76 4822.24,6310 5465.91,6310 5486.21,6289.7 5604.7,6289.7 v1(5604.7,6281.21)
  Bottom Layer w8: v1(4050,5465) 4050,5235 4130,5155 v1(4195.32,5155)
ARM_SERVO_L: JARM_L1.3 U1.31 | length 3015.8
  Top Layer w8: 3669.6,5268 U1.31@3657.6,5280 3657.6,5367.6 ; v1@3680,5370 v1(3680,5380) v1@3680,5390 ; 3657.6,5367.6 v1@3675,5385 ; 3657.6,5367.6 v1@3675,5385 ; v1@3675,5385 v1@3680,5390 ; v1@3675,5385 v1@3680,5390
  Mid-Layer Top w8: v1@3680,5370 v1(3680,5380) 3680,5390 3681,5391 3779,5391 3779,5390.09 3800.09,5369 3820.09,5369 3855.09,5334 3884.91,5334 3915.91,5365 4565,5365 4690,5240 4690,5230 v1(4685,5225)
  Mid-Layer Bottom w8: v1(4685,5225) 4684,5224 4684,5130.09 4705.09,5109 4706,5109 4733,5082 v1(5148,5082) ; v1(5289.12,5067) 5280,5057.88 5280,4995 5310,4965 5915,4965 JARM_L1.3@5980,4900
  Bottom Layer w8: v1(5148,5082) v1@5148,5067 ; v1@5148,5067 v1(5289.12,5067) v1@5148,5067
ARM_SERVO_R: JARM_R1.3 U1.30 | length 1660.6
  Top Layer w8: v1(3400,5370) 3429,5341 3429,5300.09 3465.09,5264 3541.73,5264 3586.73,5219 3665.47,5219 3684.6,5238.13 3684.6,5276 U1.30@3688.6,5280
  Mid-Layer Bottom w8: JARM_R1.3@2580,4920 2595,4920 2640,4965 3045,4965 v1(3080,5000)
  Bottom Layer w8: v1(3080,5000) 3055,5025 3055,5130 3055,5335 3365,5335 v1(3400,5370)
AUX1: AUX1.3 R2.2 | length 1339.3
  Top Layer w12: v1(3300,5065) 3332.44,5097.44 R2.2@3332.44,5120
  Mid-Layer Top w12: AUX1.3@2580,5440 2580,5445 v1@2710,5575
  Mid-Layer Bottom w12: v1(2708.53,5573.53) 2715,5580 2905,5580 2945,5540 2945,5345 3020,5270 3020,5055 3121.26,5055 3149.26,5083 3180.74,5083 3203,5060.74 3203,5055.74 3203.74,5055 3290,5055 v1(3300,5065)
AUX2: AUX2.3 R3.2 | length 3945.8
  Top Layer w12: v1@3323.19,5233.74 3323.19,5189.25 R3.2@3332.44,5180
  Mid-Layer Top w10: v1(4320,6016) 4340,5996 4340,5888 4351,5877 4470,5877 4672,5675 4672,5579 4704,5547 4736,5547 4746,5537 4790,5537 4807,5520 4807,5448 4822,5433 4882,5433 4907,5408 4907,5369 4928,5348 5094,5348 5198,5452 v1(5573,5452)
  Mid-Layer Bottom w10: 3627.74,5425 3735.74,5533 4043,5533 4138,5628 4138,5830 4192,5884 4333,5884 v1@4333,6003
  Mid-Layer Bottom w12: 3627.74,5425 3600.74,5398 3494.26,5398 ; v1(5573,5452) 5585,5440 5740,5440 AUX2.3@5980,5440 ; 3494.26,5398 3338.13,5241.87 3494.26,5398
  other v1: 3335,5245
BATT_SENSE: R9.2 R10.1 U1.32 | length 361.7
  Top Layer w10: R9.2@3557.44,5560 3625.6,5491.84 U1.32@3625.6,5280
  Top Layer w12: R9.2@3557.44,5560 3560,5562.56 R10.1@3560,5612.44
CS_SD: R15.2 U1.42 | length 2367.5
  Top Layer w8: v1@3347.91,4922.91 3366,4941 U1.42@3506.6,4941 ; v1(4655,5445) 4665,5455 4665,5605 4690.47,5630.47 R15.2@4785,5630.47
  Mid-Layer Top w8: v1(3350,4910) 3400,4960 3801.36,4960 3846.36,4915 4202.1,4915 4217.1,4900 4580,4900 v1@4605,4875
  Mid-Layer Bottom w8: v1(4605,4870) 4605,5395 v1(4655,5445)
GND: AUX1.1 AUX2.1 C1.1 C2.1 C4.1 C5.1 C6.1 C7.2 C8.2 C9.2 C10.2 C11.2 C12.2 C13.1 C14.1 C15.1 C16.2 C17.2 C18.1 C19.1 C21.1 C22.2 C24.1 C25.1 C26.1 C27_MTR_L.2 C27_MTR_R.2 C28_MTR_L.2 C28_MTR_R.2 C103.1 J1.6 J2.1 J3.6 JARM_L1.1 JARM_R1.1 JBAT1.1 JRFID1.1 JTOP1.4 JULTRA1.1 JULTRA2.1 JULTRA3.1 MK1.2 Q3.C R9.1 R12.2 R14.2 R16.2 R19.2 R21.2 R24.2 R27.2 R31.1 R36_MTR_L.1 R36_MTR_R.1 R37_MTR_L.2 R37_MTR_R.2 U1.6 U1.18 U1.28 U1.39 U2.2 U2.4 U2.5 U3.1 U5.GND U5.GPIO0 U5.GPIO2 U6.7 U7.3 U7.6 U7.13 U7.PP U8.1 U8.4 U9.4 U9.5 U10.3 U10.6 U10.13 U10.PP U11_MTR_L.1 U11_MTR_L.4 U11_MTR_R.1 U11_MTR_R.4 U101.GND ULED_L1.3 ULED_R1.3 | length 55020.1
  Top Layer w8: C18.1@4747.56,4500 4749.53,4500 4783.93,4500 4833.71,4549.78 4967.97,4549.78 4982.93,4564.74 4982.93,4612.93 v1(4985,4615) ; U2.2@5632.76,6136.69 5632.76,6119.27 5648.87,6103.15 5691.85,6103.15 5695.75,6107.06 U2.4@5695.75,6136.69 U2.5@5727.24,6136.69 5729.47,6134.46 5729.47,6008.16 5749.53,5988.1 C8.2@5749.53,5935
  Top Layer w10: v1(2875.47,4435.47) 2877.44,4437.44 2940,4437.44 C28_MTR_R.2@3000,4437.44 ; 3648,6077.42 3664,6061.42 U101.GND@3880,6061.42 ; v1@3751.6,4867.5 v1(3762.05,4877.95) ; v1(3912.05,5077.95) 3912.05,5066 v1@3924,5066 ; U8.1@4901.06,4625 4915,4625 v1@4975,4625 ; C28_MTR_L.2@5393.97,4470.47 5393.97,4431.03 v1(5395.94,4429.06)
  Top Layer w12: v1(2875.47,4435.47) R37_MTR_R.2@2940,4435.47 3000,4435.47 3010.12,4435.47 3036.9,4408.69 3093.22,4408.69 R36_MTR_R.1@3120,4435.47 ; U9.5@2905.67,5770 2950,5770 2980,5740 2980,5365.47 R31.1@3000.47,5345 3040,5305.47 3040,5240 3060.63,5219.37 MK1.2@3122.6,5219.37 ; U1.39@3506.6,5035 v1@3605,5035 ; R9.1@3612.56,5560 3650,5560 3669.55,5540.45 3669.55,5519.98 C6.1@3680,5509.53 3688.54,5509.53 3751.6,5446.47 U1.28@3751.6,5280 3751.6,5183.4 v1@3772.05,5162.95 ; v1@3751.6,4867.5 U1.6@3751.6,4790 3751.6,4730.06 C1.1@3709.49,4687.95 3735.86,4661.58 3735.86,4468.28 3744.38,4459.76 3975.62,4459.76 3983.24,4467.37 3983.24,4589.32 C2.1@3884.61,4687.95 ; v1@3924,5066 U1.18@3996.6,5066 ; U5.GND@4749.12,5490.06 U5.GPIO2@4849.12,5490.06 U5.GPIO0@4949.12,5490.06 ; C18.1@4749.53,4498.03 4749.53,4500 R24.2@4749.53,4560 ; v1(4985,4615) 5012,4642 5012,4671.65 5055,4714.65 5147.09,4714.65 C103.1@5152.44,4720 ; R21.2@4985,5225.47 4998.28,5238.75 5015.97,5238.75 5092.12,5314.89 5092.12,5407.87 5066.93,5433.06 5006.12,5433.06 U5.GPIO0@4949.12,5490.06 ; v1@5032.83,5827.83 4970.91,5827.83 4961.96,5836.78 4840.09,5836.78 4754.28,5750.98 4754.28,5670.36 4761.9,5662.75 4812.72,5662.75 R16.2@4845,5630.47 4871.78,5657.25 4933.1,5657.25 4959.88,5630.47 R14.2@4970,5630.47 4989.16,5649.64 4999.28,5649.64 5006.9,5657.25 5053.1,5657.25 5079.88,5630.47 R12.2@5085,5630.47 ; R19.2@5169.64,5535.72 5033.96,5535.72 4988.31,5490.06 U5.GPIO0@4949.12,5490.06 ; R37_MTR_L.2@5335.94,4470.47 C28_MTR_L.2@5393.97,4470.47 ; v1(5395.94,4429.06) C28_MTR_L.2@5395.94,4472.44 ; U11_MTR_L.1@5405,4651.06 v1(5405,4735) ; v1(5515,4435) 5515.94,4435.94 R36_MTR_L.1@5515.94,4470.47 ; v1(5550.78,4710.48) 5555,4706.26 U11_MTR_L.4@5555,4651.06 ; C8.2@5749.53,5935 v1(5790,5935)
  Top Layer w20: JULTRA2.1@3430,4340 3483.47,4393.47 3499.27,4393.47 3533.47,4427.67 3533.47,4459.27 3580,4505.8 J1.6@3580,4540 ; ULED_L1.3@3670.08,2773.39 3670.08,2795.08 3705.47,2830.47 C11.2@3920,2830.47 4030.47,2830.47 4140,2940 4310,2770 4706.69,2770 ULED_R1.3@4710.08,2773.39 4743.18,2773.39 4789.71,2819.91 4860.82,2819.91 4870.78,2809.96 4899.96,2809.96 C12.2@4940,2850 ; Q3.C@4245,4736.42 4256.42,4725 4840,4725 4915,4650 U8.1@4915,4625 ; C21.1@4347.56,4540 4355,4532.56 4355,4487.44 C19.1@4327.56,4460 4367.56,4420 v1(4385,4420) 4415.47,4450.47 R27.2@4440,4450.47 ; U8.4@4901.06,4475 v1(4950,4426.06) ; v1@4975,4625 v1(4985,4615) ; J3.6@5032.83,5751.3 5032.83,5827.83 v1(5035,5830) ; C7.2@5749.53,5865 C8.2@5749.53,5935
  Top Layer w25: U9.5@2950,5770 U9.4@3114.33,5770 3200,5770 v1(3254.5,5824.5) ; U11_MTR_R.1@2985,4636.06 v1(2985,4730) ; U11_MTR_R.4@3135,4636.06 v1(3175,4676.06) ; U3.1@3579.95,6054.87 3586.5,6061.42 U101.GND@3880,6061.42 ; U6.7@5050,4885.51 v1(5050,4960) v1@5050,4970
  Mid-Layer Top w10: 2531,5120 2531,6199.06 ; 3094.07,6340.07 3097.18,6343.18 ; 6023.48,6249.19 6018,6249.19 6018,6248 6030,6248 6030,6242.67
  Mid-Layer Top w12: v1@5510,4425 5515,4430 v1(5515,4435)
  Mid-Layer Top w20: J1.6@3580,4540 J1.6@3582,4538
  Mid-Layer Top w25: JARM_R1.1@2580,4720 2580,4750.66 2530.97,4799.69 2530.97,6199.03 2575,6243.06 2575.62,6244.26 2833.19,6301.22 3094.1,6340.07 3358.21,6360.68 3705.68,6360.68 3723.18,6343.18 3796.35,6270 v1@3796.35,6171.35 ; v1(3960,6170) 4005,6215 4005,6300 4070.6,6365.6 5240.89,6365.6 5505,6345 5765.91,6306.15 6023.48,6249.19 ; JARM_L1.1@5980,4700 6030,4750 6030,6242.67
  Bottom Layer w10: C14.1@2680,5389.53 C14.1@2705,5389.53 ; C14.1@2705,5379.53 C14.1@2705,5389.53 ; U7.PP@2732.76,5120 U7.PP@2773,5120 ; C13.1@2760,5413.15 2726.15,5413.15 2705,5392 C14.1@2705,5389.53 ; 2761.61,5044 2800,5044 2838.39,5044 2853,5044 2854.5,5045.5 U7.PP@2929,5120 ; U7.PP@2800,5100 2772,5100 2772,5119 U7.PP@2773,5120 ; 2915,5366 2880,5401 2860.65,5399.72 2761.32,5393.18 2753.25,5392.64 2706,5389.53 C14.1@2705,5389.53 ; 2945,5336 2980,5301 2980,5275 ; 2980,5205 2980,5235 ; 3453,5930 3523,6000 3526.69,6000 3585,6000 ; v1(3612.05,5027.95) v1@3622.05,5037.95 ; C9.2@3637.26,5947.74 C9.2@3645,5940 ; v1@3757.05,5172.95 v1(3772.05,5157.95) ; v1@3790.02,5144.98 3910,5264.96 3910,5426 3865.5,5470.5 ; 3795,5790 3805.5,5779.5 3813,5772 3813,5613.43 3870.5,5613.43 ; 4570,5470.6 4570,5498 ; v1@4968,4632 4985,4649 ; C17.2@5021.46,4500.47 4985,4536.93 v1(4985,4615) 4985,4649 ; v1@5045,4975 5045,4997 5088,5040 5100,5040 ; 5664.66,6324 5680,6324 5682.68,6321.32 ; v2(5666.38,5146.38) 5690,5146.38 U10.PP@5690,5170 5690,5193.62 5690,5209 5745.3,5264.3 5766.96,5285.96 5767,5286 6021.57,5296.57 6032,5297 6032,6197 6031.85,6197.15 ; v1(5695,4705) 5002,4705 4985,4688 4985,4680 4985,4649 ; 5938.36,6270 5959,6270 5964.86,6264.14 ; 6012.59,6253.58 6006,6253.58 6006,6253 6017.59,6253 6017.59,6248.58 ; U7.PP@2773,5120 2776.38,5120 2800,5120 2823.62,5120 U7.PP@2929,5120 ; U7.PP@2773,5120 2776.38,5123.38 v2(2776.38,5123.62) 2800,5123.62 v2(2823.62,5123.62) 2932.62,5123.62 U7.PP@2929,5120
  Bottom Layer w12: U7.6@2761.61,4985.83 2761.61,5061.61 v2(2776.38,5076.38) ; U7.13@2812.8,5214.17 2812.8,5134.45 v2(2823.62,5123.62) ; v2(2823.62,5076.38) 2838.39,5061.61 U7.3@2838.39,4985.83 ; v1@3622.05,5037.95 3747.05,5037.95 ; C4.1@3695.2,5172.95 v1@3757.05,5172.95 ; 3752.05,5032.95 3762.05,5022.95 v1(3762.05,4877.95) ; 3790.02,5070.93 v1@3790.02,5144.98 ; 3877.05,5157.95 3877.05,5092.95 v1@3892.05,5077.95 ; v1@3960,6179.83 3980.17,6200 3990,6200 4540,6200 4765,5975 5485,5975 5525,5935 v1(5790,5935) ; v1(5405,4735) 5405,4736.93 C27_MTR_L.2@5484.53,4816.46 ; C27_MTR_L.2@5484.53,4825 C27_MTR_L.2@5484.53,4816.46 ; v1(5550.78,4710.48) 5550.78,4720.22 5484.53,4786.47 C27_MTR_L.2@5484.53,4816.46 ; U10.13@5575.83,5182.8 5655.55,5182.8 v2(5666.38,5193.62) ; v2(5713.62,5146.38) 5728.39,5131.61 U10.6@5804.17,5131.61 ; v2(5713.62,5193.62) 5728.39,5208.39 U10.3@5804.17,5208.39
  Bottom Layer w20: AUX1.1@2580,5640 2580,5710 2570,5720 2570,6005 2650,6085 2711.13,6085 2790,6163.87 2790,6225 2835,6270 3030,6270 3075,6315 3710,6315 3795,6230 3795,6200 ; C14.1@2705,5379.53 2741.38,5379.53 2743,5381.15 2743,5382.4 2766.88,5406.27 2783.75,5423.15 C13.1@2785,5423.15 ; v2(2823.62,5123.62) 2835,5135 2910,5135 2980,5205 ; C15.1@2885.47,5409.53 2915,5380 2915,5300 2980,5235 ; J1.6@3580,4540 3601.6,4561.6 3601.6,4772.4 3595,4779 3595,4875.91 3752.05,5032.95 3757.05,5037.95 ; C4.1@3695.2,5172.95 3711.57,5156.57 C5.1@3711.57,5092.95 ; v1(3960,6170) 3995,6135 4505,6135 4725,5915 4950,5915 v1(5035,5830) v1@5035,5835 ; v1(4385,4420) 4420,4385 4914.53,4385 C17.2@5030,4500.47 ; 4421.61,5750.62 4570,5602.23 4570,5470.6 4770.6,5270 5249.4,5270 5287,5232.4 5287,5137.6 5262.4,5113 5227.6,5113 5216.6,5124 5063.4,5124 4979.53,5040.13 4979.53,4980 C16.2@4979.53,4970 ; v1(4985,4615) 4985,4680 5050,4745 v1(5050,4960) v1@5050,4970 ; 5100,5040 5256.73,5040 5271.73,5025 5298.73,5025 5464.13,4859.6 5464.13,4845.4 C27_MTR_L.2@5484.53,4825 ; C25.1@5410.47,5100 5371.85,5138.62 C24.1@5371.85,5190 5371.85,5298.62 C26.1@5370.47,5300 5370.47,5330.47 5390.87,5350.87 5430.87,5350.87 5470,5390 5580,5390 5666.38,5303.62 v2(5666.38,5193.62)
  Bottom Layer w25: JBAT1.1@2580,5120 2529.57,5170.43 2529.57,6205.83 2577.29,6253.56 2834.86,6310.52 3095.77,6349.37 3359.88,6369.97 3700,6369.97 3795,6274.97 3795,6230 ; C15.1@2885.47,5409.53 C15.1@2860,5409.53 2798.62,5409.53 2785,5423.15 2777.5,5430.65 2663.15,5545 2663.15,5701.85 2605,5760 2605,5915 2670.97,5980.97 2670.97,6037.6 2682.4,6049.03 2739.03,6049.03 2835,6145 2835,6210 2865,6240 3060,6240 3100,6280 3715,6280 3795,6200 ; J2.1@2920,6180 2990,6110 3735,6110 v1(3795,6170) 3795,6120 3745,6070 3090,6070 JTOP1.4@3020,6000 ; v1(2985,4730) 3045,4670 3100,4670 3129.53,4699.53 C27_MTR_R.2@3129.53,4760 ; C22.2@3010,5724.53 3055.47,5770 3200,5770 v1(3254.5,5824.5) ; v1(3175,4676.06) 3175,4714.53 C27_MTR_R.2@3129.53,4760 ; v1@3254.5,5829.5 3624.5,5829.5 3735,5940 ; C9.2@3629.53,5940 3735,5940 ; 3747.05,5037.95 3757.05,5037.95 3790.02,5070.93 3877.05,5157.95 3942.55,5223.45 3942.55,5392.45 3865.5,5469.5 3865.5,5608.43 ; 3795,5790 v1(3795,6000) ; 3805.5,5779.5 3805.5,5691.57 3865.5,5631.57 3865.5,5608.43 ; 3870.5,5613.43 3865.5,5608.43 ; v1@3964.92,6174.92 v1(3960,6170) ; 3990,6200 4040,6250 4540,6250 4745,6045 JRFID1.1@5270,6045 ; C10.2@4080,5753.15 4070,5763.15 4070,5895 4014.5,5950.5 ; 4421.61,5750.62 4251.84,5750.62 4002.46,6000 ; JULTRA1.1@4505,5245 4225.87,5524.13 4039,5524.13 3991.56,5571.57 3991.56,5683.63 4014.5,5706.57 4014.5,5950.5 ; U5.GND@4749.12,5490.06 4458.41,5780.78 4458.41,5839.81 4421.24,5876.97 4226.1,5876.97 4214.68,5888.4 4214.68,5941.52 4156.2,6000 4002.46,6000 ; C16.2@4979.53,4970 5050,4970 v1@5045,4975 ; v2(5666.38,5193.62) 5690,5193.62 v2(5713.62,5193.62) ; U10.PP@5728.39,5208.39 5745.3,5225.3 5745.3,5270.5 5760.76,5285.96 6010.96,5285.96 6031.85,5306.85 6031.85,6234.32 6017.59,6248.58 ; AUX2.1@5980,5640 5765,5640 5460,5945 4750,5945 4525,6170 v1(3960,6170) ; 6012.59,6253.58 5755.02,6310.54 5494.11,6349.4 5230,6370 4025,6371.08 3960,6306.08 3960,6179.83 v1(3960,6170) ; C27_MTR_R.2@3129.53,4760 3129.53,4865.47 3005.5,4989.5 3005.5,5033.43 3010,5037.93 3010,5245 2945,5310 2945,5400 2700,5645 2700,5800 2830,5930 3456.69,5930 3526.69,6000 v1(3795,6000) ; 3735,5940 v1(3795,6000) ; 4002.46,6000 v1(3965,6000) 4014.5,5950.5
  Bottom Layer w30: U7.PP@2732.76,5120 v2(2776.38,5076.38)
  other v1: 3715,4545 5715,5020
LEDS: JULTRA2.3 JULTRA3.3 U1.24 ULED_L1.4 | length 2279
  Top Layer w8: ULED_L1.4@3796.06,2773.39 ULED_L1.4@3797.68,2775 ; v1(3870,5370) 3880,5370 3885,5375 3885,5365 3877.6,5357.6 U1.24@3877.6,5280
  Top Layer w12: ULED_L1.4@3797.68,2775 v1(4155,2775)
  Mid-Layer Top w8: JULTRA3.3@4320,2940 JULTRA3.3@4340,2940
  Mid-Layer Top w12: v1(4155,2775) JULTRA3.3@4320,2940
  Mid-Layer Bottom w8: JULTRA2.3@3630,4340 3666.06,4376.06 3708.74,4376.06 3713.21,4380.53 3746.79,4380.53 3751.26,4376.06 4020,4376.06 4039.47,4395.53 4039.47,4422.69 ; v1(3870,5370) 3880,5370 3885,5375 3885,5365 3877.6,5357.6 3926.24,5308.95 4006.96,5308.95 4039.47,5276.44 4039.47,4422.69 ; 4040,4422.16 4039.47,4422.69
MIC: R1.2 R28.2 U9.1 | length 846.8
  Top Layer w8: U9.1@3114.33,5620 3249.53,5620 R28.2@3289.53,5660 3289.53,5620.47 3290,5620 ; R1.2@3372.44,5060 3360,5072.44 3360,5190 3360.81,5190.81 3360.81,5202.27 3385,5226.46 3385,5282.56
  Top Layer w12: 3290,5620 3290,5377.56 3385,5282.56
MISO: J1.1 J3.7 U1.2 U6.9 | length 3404.1
  Top Layer w8: J1.1@3380,4440 3422.69,4440 3463.21,4480.53 3477.84,4480.53 3520.53,4523.21 3520.53,4565.53 3616.16,4661.16 3643.84,4661.16 3645,4662.31 3645,4733.73 3625.6,4753.13 U1.2@3625.6,4790 ; v1(5020,5140) 5020,5094.49 U6.9@5000,5074.49 5000,5035 5015,5020 5170,5020 5281,5131 5281,5569 5225,5625 5225,5702.03 5191.12,5735.91 5191.12,5781.79 5181.09,5791.82 5101.11,5791.82 5076.14,5766.85 J3.7@5076.14,5751.3
  Bottom Layer w8: v1(3645,4660) 3685,4660 3945,4920 4570,4920 4764,5114 4794.91,5114 4860.91,5180 4970,5180 5010,5140 v1(5020,5140)
MOSI: J1.4 R13.2 U1.1 U6.4 | length 3934
  Top Layer w8: J1.4@3480,4540 3480,4546.21 3594.6,4660.81 U1.1@3594.6,4790 v1(3559.6,4755) ; v1(4910,4805) 4909.91,4805 4907,4807.91 4907,4878.51 U6.4@4900,4885.51 4900,4945 4960,5005 5176.21,5005 5296,5124.79 5296,5599 v1@5270,5625 ; R13.2@4910,5630.47 4910,5615 v1(4945,5580) v1@4955,5570
  Mid-Layer Top w8: v1(4945,5580) 5115,5580 5170,5635 v1(5270,5635)
  Bottom Layer w8: v1(3559.6,4755) 3576,4738.6 3576,4593.31 3539.47,4556.79 3539.47,4523.21 3563.21,4499.47 3859.47,4499.47 3940,4580 3940,4668 3914,4694 3914,4809.91 3940,4835.91 3940,4836 4128.49,4836 4177.99,4786.5 4585.59,4786.5 4621.09,4822 4706.91,4822 4773.91,4755 4860,4755 4907,4802 4907,4805 4907,4807.91 4909.91,4805 v1(4910,4805)
MTR_L_BCK: J1.3 R11.2 U1.3 U6.12 | length 2878.1
  Top Layer w8: J1.3@3480,4440 3539.47,4499.47 3539.47,4556.79 3563.21,4580.53 3665.53,4580.53 v1(3675,4590) 3675,4618 3681,4624 3681,4674.91 3660,4695.91 3660,4787.6 U1.3@3657.6,4790 ; 4850,5118.74 4929.95,5198.69 5083.69,5198.69 5250,5365 5250,5520 5185,5585 5075.47,5585 R11.2@5030,5630.47
  Bottom Layer w8: v1@3680,4585 3725,4630 3725,4675 3935,4885 4565,4885 4760,5080 4815,5080 v1@4875.82,5140.82
  other v1: 4875.82,5144
MTR_L_EN: U1.13 U6.10 U6.13 | length 1322.5
  Top Layer w8: U1.13@3996.6,4909 4096,4909 4125,4880 4216.21,4880 4296.21,4800 4484.09,4800 4590.09,4906 4631.51,4906 4679.51,4954 4764.91,4954 4800,4989.09 ; U6.13@4800,5074.49 4800,4989.09 ; U6.10@4950,5074.49 U6.10@4956.88,5067.61 ; 4800,4989.09 4878.36,4989.09 ; 4878.36,4989.09 U6.10@4956.88,5067.61 ; 4878.36,4989.09 U6.10@4956.88,5067.61
MTR_L_PULSE: R34_MTR_L.2 R99_MTR_L.2 U1.34 U11_MTR_L.7 | length 3617.3
  Top Layer w8: U1.34@3506.6,5192 3506.6,5221.6 v1(3510,5225) ; R99_MTR_L.2@5630.94,4529.53 5635,4533.59 v1(5635,4585)
  Top Layer w12: U11_MTR_L.7@5455,4908.94 5455,4795 5485,4765 5550,4765 5590,4725 5590,4591.1 5570.94,4572.04 R34_MTR_L.2@5570.94,4529.53 R99_MTR_L.2@5630.94,4529.53
  Bottom Layer w8: v1(3510,5225) 3510,4700.91 3504,4694.91 3504,4573.31 3520.53,4556.79 3520.53,4520.94 3557,4484.47 4269.62,4484.47 4390.09,4364 4958.3,4364 5078.77,4484.47 5534.47,4484.47 v1(5635,4585)
MTR_R_EN: U1.14 U6.2 U6.5 | length 1409.2
  Top Layer w8: U1.14@3996.6,4941 3959.73,4941 3935.6,4916.87 3935.6,4870.13 3946.73,4859 4078.6,4859 4087.6,4850 4188.31,4850 4289.31,4749 4649.91,4749 4650.91,4750 4750,4750 4800,4800 ; U6.2@4800,4885.51 4800,4800 ; 4814,4786 4814,4785.09 ; U6.5@4950,4885.51 4950,4794.09 4919.91,4764 4835.09,4764 4814,4785.09 ; 4800,4800 4800,4799.09 4814,4785.09
MTR_R_FWD: U1.43 U6.1 | length 1797.9
  Top Layer w8: v1@3325,4830 3404,4909 U1.43@3506.6,4909 ; v1(4562.5,4822.5) 4686.99,4822.5 U6.1@4750,4885.51
  Mid-Layer Top w8: v1@3302.96,4832.04 v1(3309.9,4825.1) 3316.01,4825.1 3386,4895.09 3386,4901.19 3429.81,4945 3795.15,4945 3840.15,4900 4195.89,4900 4210.89,4885 4500,4885 v1(4562.5,4822.5) v1@4565,4820
MTR_R_PULSE: R34_MTR_R.2 R99_MTR_R.2 U1.33 U11_MTR_R.7 | length 1595.4
  Top Layer w8: v1@3150,4996.8 v1(3139,4996.8) 3090.8,5045 3055,5045 3035,5025 U11_MTR_R.7@3035,4893.94 3035,4780 3110.22,4704.78 3110.22,4568.71 3175,4503.93 R34_MTR_R.2@3175,4494.53 R99_MTR_R.2@3235,4494.53 ; U1.33@3594.6,5280 v1@3594.6,5350.4
  Mid-Layer Top w8: v1(3139,4996.8) v1@3150,4996.8 ; 3157.2,5015 3230,5015 3335,5015 3360,5040 3388.79,5040 3420,5071.21 3420,5330 3450,5360 v1(3585,5360)
NetC1_2: C1.2 U1.7 XTAL1.2 | length 286
  Top Layer w12: U1.7@3782.6,4790 3782.6,4722.6 3764.61,4704.61 C1.2@3764.61,4687.95 3764.61,4620.39 3785.2,4599.8 XTAL1.2@3785.2,4520
NetC2_2: C2.2 U1.8 XTAL1.1 | length 319.8
  Top Layer w12: U1.8@3814.6,4790 3814.6,4702.84 C2.2@3829.49,4687.95 3830,4687.44 3830,4624.8 XTAL1.1@3934.8,4520
NetC3_1: C3.1 J2.6 | length 1890.7
  Top Layer w8: v1(3255,4760) C3.1@3352.44,4760 ; J2.6@3420,6180 3320,6080 3320,5915.98 3390,5845.98 3390,5641.21 3480,5551.21 3480,5350.91 v1@3515.91,5315 ; v1(3530,5300) v1@3530,5315 ; v1@3515.91,5315 v1@3530,5315 ; v1@3515.91,5315 v1@3530,5315
  Mid-Layer Top w8: v1(3255,4760) 3214,4801 3214,4944.91 3259.09,4990 3360.91,4990 3450,5079.09 3450,5220 v1(3530,5300)
  Mid-Layer Bottom w8: v1(3530,5300) v1@3530,5315
NetC6_2: C6.2 U1.29 | length 187.3
  Top Layer w10: C6.2@3680,5450.47 3680,5445 3720.6,5404.4 U1.29@3720.6,5280
NetC14_2: C14.2 U7.11 | length 171.1
  Bottom Layer w10: C14.2@2680,5330.47 2695,5330.47 C14.2@2705,5320.47
  Bottom Layer w12: C14.2@2705,5320.47 2705,5285 2723.46,5266.54 2744.26,5266.54 2761.61,5249.19 U7.11@2761.61,5214.17
NetC15_2: C15.2 U7.14 | length 177.3
  Bottom Layer w12: U7.14@2838.39,5214.17 2838.39,5251.61 2810,5280 2810,5315 2845.47,5350.47 C15.2@2860,5350.47
NetC18_2: C18.2 D1.2 R24.1 U8.2 | length 376
  Top Layer w8: R24.1@4690.47,4560 4719.19,4588.72 4767.86,4588.72 4781.58,4575 U8.2@4901.06,4575
  Top Layer w12: D1.2@4609.45,4574.37 4623.82,4560 R24.1@4690.47,4560 4692.44,4558.03 C18.2@4692.44,4500
NetC19_2: C19.2 C20.2 JANTENNA.1 | length 215.8
  Top Layer w10: C20.2@4172.44,4540 C20.2@4172.44,4532.44 ; C20.2@4172.44,4532.44 4180,4532.44 C20.2@4172.44,4532.44
  Top Layer w20: C20.2@4180,4532.44 JANTENNA.1@4180,4440 4252.44,4440 C19.2@4272.44,4460
NetC20_1: C20.1 C21.2 Q5.1 | length 180
  Top Layer w20: C20.1@4227.56,4540 C21.2@4292.44,4540 4292.44,4577.44 4310.71,4595.71 Q5.1@4362.6,4595.71
NetC23_1: C23.1 R30.1 | length 60.8
  Top Layer w12: R30.1@3080,5470.47 3081.97,5472.44 C23.1@3140,5472.44
NetC23_2: C23.2 MK1.1 R29.2 | length 614.6
  Top Layer w8: MK1.1@3197.4,5219.37 3197.4,5284.88 3235.25,5322.73 3235.25,5388.17 3171.28,5452.14 3171.28,5500.21 ; 3171.28,5500.21 3141.97,5529.53 3171.28,5500.21
  Top Layer w10: R29.2@3200,5529.53 3170.97,5529.53 ; C23.2@3143.94,5527.56 3169,5527.56 ; C23.2@3143.94,5527.56 C23.2@3140,5527.56 C23.2@3143.94,5527.56 ; C23.2@3143.94,5527.56 3169,5527.56 ; 3169,5527.56 3170.97,5529.53 ; 3169,5527.56 3170.97,5529.53
  Top Layer w12: C23.2@3141.97,5529.53 R29.2@3200,5529.53 C23.2@3141.97,5529.53
NetC25_2: C25.2 U10.11 | length 119.4
  Bottom Layer w12: C25.2@5469.53,5100 5501.14,5131.61 U10.11@5575.83,5131.61
NetC26_2: C26.2 U10.14 | length 184.2
  Bottom Layer w12: C26.2@5429.53,5300 5493.06,5236.46 5511.45,5236.46 5539.53,5208.39 U10.14@5575.83,5208.39
NetC28_MTR_L_1: C28_MTR_L.1 D3_MTR_L.2 D4_MTR_L.2 R35_MTR_L.1 R37_MTR_L.1 | length 940.3
  Top Layer w12: R37_MTR_L.1@5335.94,4529.53 5337.91,4527.56 C28_MTR_L.1@5395.94,4527.56 5398.85,4527.56 R35_MTR_L.1@5455.94,4470.47 5455.94,4434.06 5495,4395 5645,4395 5700,4450 5700,4595.81 5766.25,4662.06 5807.06,4662.06 v1(5820,4675) v1@5815,4675
  Bottom Layer w12: v1@5824.45,4670.55 D3_MTR_L.2@5875.63,4670.55 5875.63,4550.71 D4_MTR_L.2@5874.37,4549.45
NetC28_MTR_R_1: C28_MTR_R.1 D3_MTR_R.2 D4_MTR_R.2 R35_MTR_R.1 R37_MTR_R.1 | length 941.2
  Top Layer w10: v1(2739.45,4680.55) 2773.94,4646.06 2792.4,4646.06 ; R35_MTR_R.1@3060,4435.47 3002.91,4492.56 C28_MTR_R.1@3000,4492.56 ; 2792.4,4646.06 R37_MTR_R.1@2941.96,4496.49 ; 2792.4,4646.06 R37_MTR_R.1@2941.96,4496.49 ; R37_MTR_R.1@2941.96,4496.49 R37_MTR_R.1@2945.89,4492.56 ; R37_MTR_R.1@2941.96,4496.49 R37_MTR_R.1@2945.89,4492.56 ; R37_MTR_R.1@2943.93,4494.53 R37_MTR_R.1@2940,4494.53 R37_MTR_R.1@2943.93,4494.53 ; R37_MTR_R.1@2943.93,4494.53 2969,4494.53 ; R37_MTR_R.1@2945.89,4492.56 C28_MTR_R.1@3000,4492.56 ; R37_MTR_R.1@2945.89,4492.56 C28_MTR_R.1@3000,4492.56 ; 2969,4494.53 2970.97,4492.56 ; 2969,4494.53 2970.97,4492.56 ; 2970.97,4492.56 C28_MTR_R.1@3000,4492.56
  Bottom Layer w10: D3_MTR_R.2@2679.37,4559.45 2680.63,4560.71 D4_MTR_R.2@2680.63,4680.55 v1(2739.45,4680.55)
NetD1_1: D1.1 D2.1 Q5.2 R27.1 | length 308.1
  Top Layer w20: R27.1@4440,4509.53 4437.4,4512.13 Q5.2@4437.4,4595.71 4458.74,4574.37 D1.1@4529.45,4574.37 D2.1@4529.45,4454.37
NetD2_2: D2.2 R26.2 | length 87
  Top Layer w12: D2.2@4609.45,4454.37 4623.82,4440 R26.2@4690.47,4440
NetD3_MTR_L_1: D3_MTR_L.1 JM1_MTR_L.2 L1_MTR_L.2 | length 309.7
  Bottom Layer w25: L1_MTR_L.2@5784.06,4760.94 5794.45,4750.55 D3_MTR_L.1@5875.63,4750.55 5930.97,4695.21 5930.97,4662.4 5980,4613.37 JM1_MTR_L.2@5980,4580
NetD3_MTR_R_1: D3_MTR_R.1 JM1_MTR_R.2 L1_MTR_R.2 | length 398.7
  Bottom Layer w30: JM1_MTR_R.2@2580,4480 D3_MTR_R.1@2678.82,4480 ; L1_MTR_R.2@2775,4604.06 L1_MTR_R.2@2775,4576.18 ; D3_MTR_R.1@2678.82,4480 L1_MTR_R.2@2775,4576.18 ; D3_MTR_R.1@2678.82,4480 L1_MTR_R.2@2775,4576.18
NetD4_MTR_L_1: D4_MTR_L.1 JM1_MTR_L.1 L2_MTR_L.1 | length 297
  Bottom Layer w25: L2_MTR_L.1@5784.06,4619.06 5784.06,4570.95 5833.56,4521.45 5833.56,4510.26 D4_MTR_L.1@5874.37,4469.45 5884.92,4480 JM1_MTR_L.1@5980,4480
NetD4_MTR_R_1: D4_MTR_R.1 JM1_MTR_R.1 L2_MTR_R.1 | length 322.7
  Bottom Layer w30: JM1_MTR_R.1@2580,4580 2643.63,4643.63 2643.63,4723.55 D4_MTR_R.1@2680.63,4760.55 2695.24,4745.94 L2_MTR_R.1@2775,4745.94
NetJ3_2: J3.2 R15.1 R16.1 | length 127.8
  Top Layer w10: R15.1@4785,5689.53 R16.1@4845,5689.53 4859.6,5704.13 J3.2@4859.6,5751.3
NetJ3_3: J3.3 R13.1 R14.1 | length 124.7
  Top Layer w10: J3.3@4902.91,5751.3 4902.91,5696.62 R13.1@4910,5689.53 R14.1@4970,5689.53
NetJ3_5: J3.5 R11.1 R12.1 | length 133.5
  Top Layer w10: J3.5@4989.52,5751.3 4989.52,5730 R11.1@5030,5689.53 R12.1@5085,5689.53